# EAGLE board axiom_beta_power_board_v1.25-Beta.0e59fee9 (EAGLE 7.7.0), part 1 of 5
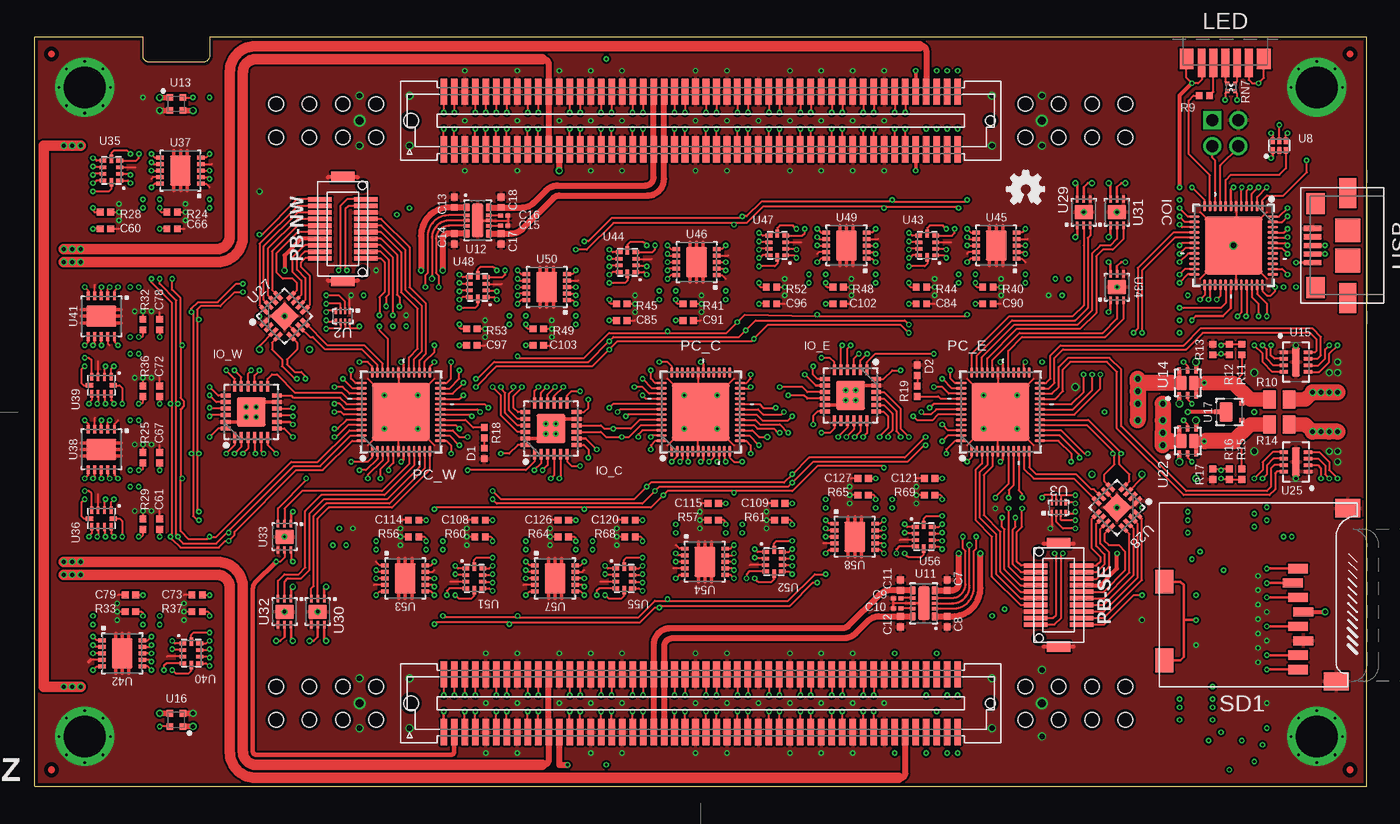
[diagram p0: board, top side]
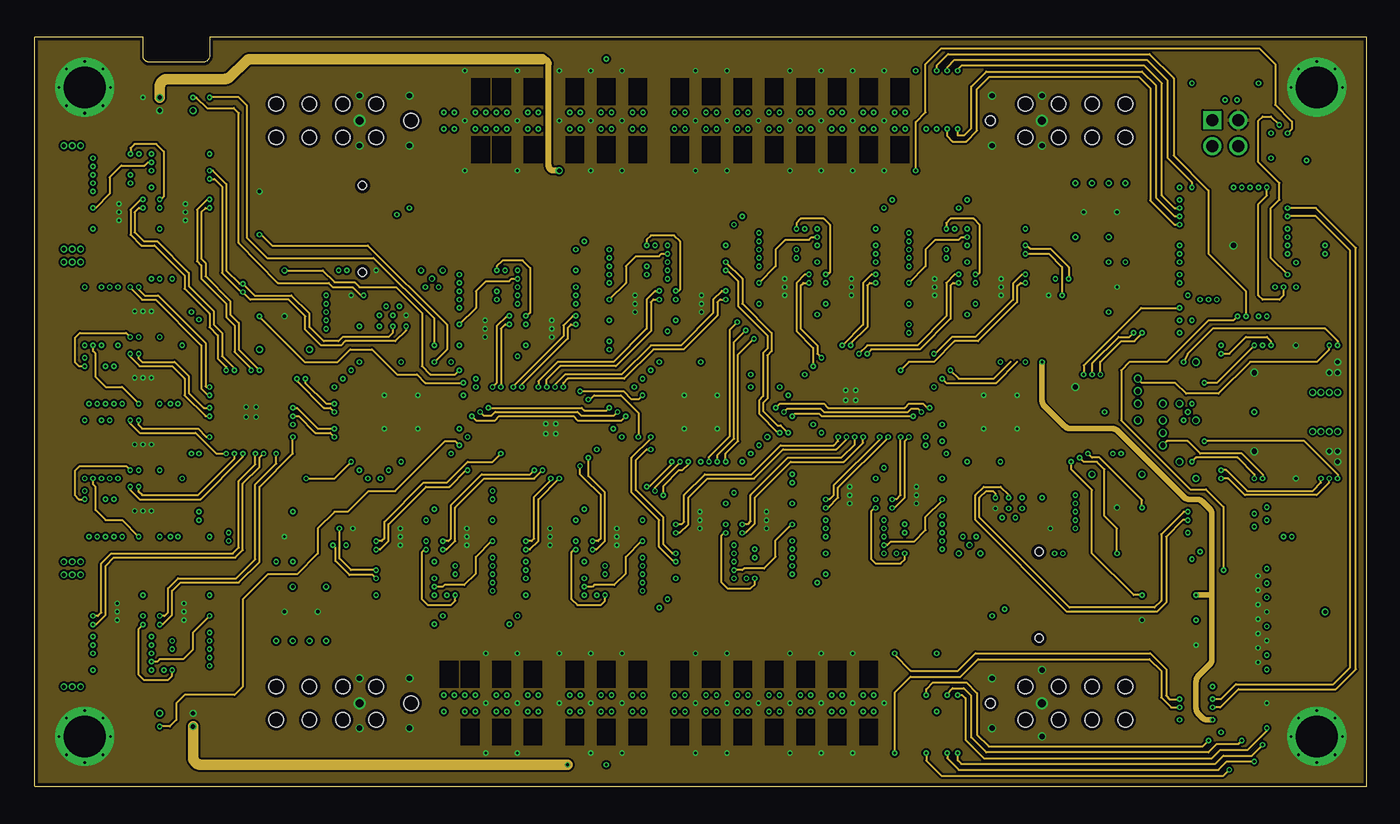
[diagram p1: board, inner layer Route2]
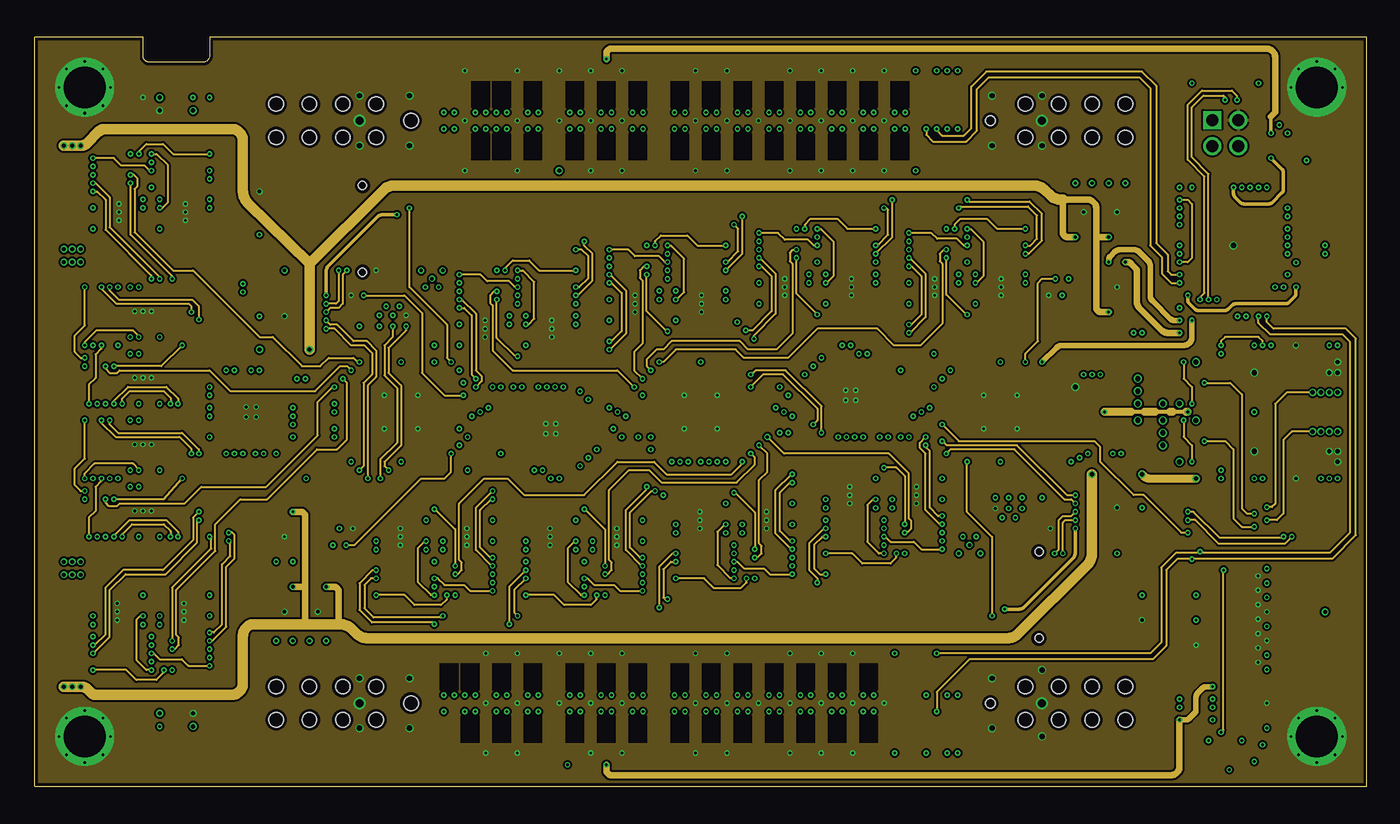
[diagram p2: board, inner layer Route15]
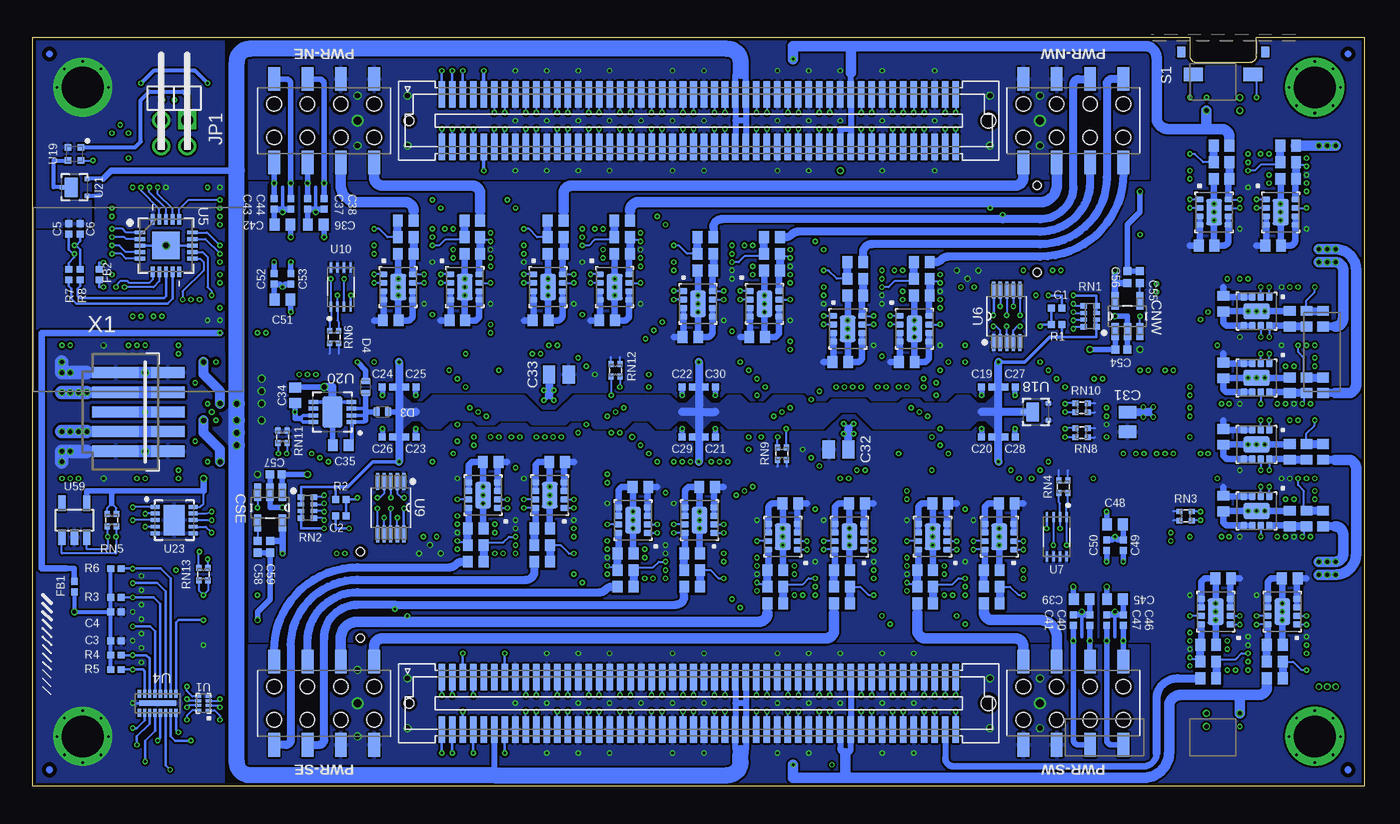
[diagram p3: board, bottom side, seen from below]

Size 101.6 x 57.15 mm. Coordinates in mm from the lower left corner, seen from the top.
Outline: 101.6,57.15 13.33,57.15 13.33,55.75 arc-90 12.83,55.25 8.76,55.25 arc-90 8.25,55.75 8.25,57.15 0,57.15 0,0 101.6,0 101.6,57.15
Copper layers (1*2*15*16): Top 0.035559375mm / dielectric 0.17018125mm / Route2 0.01778125mm / dielectric 47mil / Route15 0.01778125mm / dielectric 0.17018125mm / Bottom 0.035559375mm
Design rules "OSHPark-4layer-tuned *": minimum track width 5mil, minimum drill 8mil, track to track 6mil, track to pad 5mil, pad to pad 5mil, via to via 5mil, smd to smd 0mil, copper to edge 10mil, drill to drill 6mil, minimum pad ring 4mil, minimum via ring 4mil, stop-mask expansion 2mil, vias tented up to drill 25mil, thermal gap 6mil
Net classes: 1 LVDS: width 0.152 mm, drill 0.203 mm, clearance 0.152 mm
tKeepout: area 1.3,50.8 to 6.3,55.9; area 1.3,1.3 to 6.3,6.3; area 95.2,1.3 to 100.3,6.3; area 95.2,50.8 to 100.3,55.9
bKeepout: area 95.2,50.8 to 100.3,55.9; area 95.2,1.3 to 100.3,6.3; area 1.3,1.3 to 6.3,6.3; area 1.3,50.8 to 6.3,55.9

## Footprints (pad centres in the part's own frame; a part is rotated, then mirrored left to right if it is on the bottom)
µZ-SOCKET-NOHOLES-R = smd 0.5 x 2: 1 19.6,24.425; 2 19.6,20.027; 3 18.8,24.425; 4 18.8,20.027; 5 18,24.425; 6 18,20.027; 7 17.2,24.425; 8 17.2,20.027; 9 16.4,24.425; 10 16.4,20.027; 11 15.6,24.425; 12 15.6,20.027; 13 14.8,24.425; 14 14.8,20.027; 15 14,24.425; 16 14,20.027; 17 13.2,24.425; 18 13.2,20.027; 19 12.4,24.425; 20 12.4,20.027; 21 11.6,24.425; 22 11.6,20.027; 23 10.8,24.425; 24 10.8,20.027; 25 10,24.425; 26 10,20.027; 27 9.2,24.425; 28 9.2,20.027; 29 8.4,24.425; 30 8.4,20.027; 31 7.6,24.425; 32 7.6,20.027; 33 6.8,24.425; 34 6.8,20.027; 35 6,24.425; 36 6,20.027; 37 5.2,24.425; 38 5.2,20.027; 39 4.4,24.425; 40 4.4,20.027; 41 3.6,24.425; 42 3.6,20.027; 43 2.8,24.425; 44 2.8,20.027; 45 2,24.425; 46 2,20.027; 47 1.2,24.425; 48 1.2,20.027; 49 0.4,24.425; 50 0.4,20.027; 51 -0.4,24.425; 52 -0.4,20.027; 53 -1.2,24.425; 54 -1.2,20.027; 55 -2,24.425; 56 -2,20.027; 57 -2.8,24.425; 58 -2.8,20.027; 59 -3.6,24.425; 60 -3.6,20.027; 61 -4.4,24.425; 62 -4.4,20.027; 63 -5.2,24.425; 64 -5.2,20.027; 65 -6,24.425; 66 -6,20.027; 67 -6.8,24.425; 68 -6.8,20.027; 69 -7.6,24.425; 70 -7.6,20.027; 71 -8.4,24.425; 72 -8.4,20.027; 73 -9.2,24.425; 74 -9.2,20.027; 75 -10,24.425; 76 -10,20.027; 77 -10.8,24.425; 78 -10.8,20.027; 79 -11.6,24.425; 80 -11.6,20.027; 81 -12.4,24.425; 82 -12.4,20.027; 83 -13.2,24.425; 84 -13.2,20.027; 85 -14,24.425; 86 -14,20.027; 87 -14.8,24.425; 88 -14.8,20.027; 89 -15.6,24.425; 90 -15.6,20.027; 91 -16.4,24.425; 92 -16.4,20.027; 93 -17.2,24.425; 94 -17.2,20.027; 95 -18,24.425; 96 -18,20.027; 97 -18.8,24.425; 98 -18.8,20.027; 99 -19.6,24.425; 100 -19.6,20.027; 101 19.6,-20.025; 102 19.6,-24.425; 103 18.8,-20.027; 104 18.8,-24.425; 105 18,-20.027; 106 18,-24.425; 107 17.2,-20.027; 108 17.2,-24.425; 109 16.4,-20.027; 110 16.4,-24.425; 111 15.6,-20.027; 112 15.6,-24.425; 113 14.8,-20.027; 114 14.8,-24.425; 115 14,-20.027; 116 14,-24.425; 117 13.2,-20.027; 118 13.2,-24.425; 119 12.4,-20.027; 120 12.4,-24.425; 121 11.6,-20.027; 122 11.6,-24.425; 123 10.8,-20.027; 124 10.8,-24.425; 125 10,-20.027; 126 10,-24.425; 127 9.2,-20.027; 128 9.2,-24.425; 129 8.4,-20.027; 130 8.4,-24.425; 131 7.6,-20.027; 132 7.6,-24.425; 133 6.8,-20.027; 134 6.8,-24.425; 135 6,-20.027; 136 6,-24.425; 137 5.2,-20.027; 138 5.2,-24.425; 139 4.4,-20.027; 140 4.4,-24.425; 141 3.6,-20.027; 142 3.6,-24.425; 143 2.8,-20.027; 144 2.8,-24.425; 145 2,-20.027; 146 2,-24.425; 147 1.2,-20.027; 148 1.2,-24.425; 149 0.4,-20.027; 150 0.4,-24.425; 151 -0.4,-20.027; 152 -0.4,-24.425; 153 -1.2,-20.027; 154 -1.2,-24.425; 155 -2,-20.027; 156 -2,-24.425; 157 -2.8,-20.027; 158 -2.8,-24.425; 159 -3.6,-20.027; 160 -3.6,-24.425; 161 -4.4,-20.027; 162 -4.4,-24.425; 163 -5.2,-20.027; 164 -5.2,-24.425; 165 -6,-20.027; 166 -6,-24.425; 167 -6.8,-20.027; 168 -6.8,-24.425; 169 -7.6,-20.027; 170 -7.6,-24.425; 171 -8.4,-20.027; 172 -8.4,-24.425; 173 -9.2,-20.027; 174 -9.2,-24.425; 175 -10,-20.027; 176 -10,-24.425; 177 -10.8,-20.027; 178 -10.8,-24.425; 179 -11.6,-20.027; 180 -11.6,-24.425; 181 -12.4,-20.027; 182 -12.4,-24.425; 183 -13.2,-20.027; 184 -13.2,-24.425; 185 -14,-20.027; 186 -14,-24.425; 187 -14.8,-20.027; 188 -14.8,-24.425; 189 -15.6,-20.027; 190 -15.6,-24.425; 191 -16.4,-20.027; 192 -16.4,-24.425; 193 -17.2,-20.027; 194 -17.2,-24.425; 195 -18,-20.027; 196 -18,-24.425; 197 -18.8,-20.027; 198 -18.8,-24.425; 199 -19.6,-20.027; 200 -19.6,-24.425 | hole 0.725: 22.1,22.225; 22.1,-22.225 | hole 1.125: -22.1,22.225; -22.1,-22.225
0402-C = smd 0.52 x 0.52: 1 -0.4,0; 2 0.4,0
0201-C = smd 0.36 x 0.32: 1 -0.28,0; 2 0.28,0
0805-C = smd 0.95 x 1.35: 1 -0.75,0; 2 0.75,0
0603-C = smd 0.75 x 0.9: 1 -0.6,0; 2 0.6,0
0402-B = smd 0.62 x 0.62: 1 -0.45,0; 2 0.45,0
SOT95P280X145-5N = smd 1.321 x 0.559: 1 -1.168,0.94; 2 -1.168,0; 3 -1.168,-0.94; 4 1.168,-0.94; 5 1.168,0.94
DFN1006D-2 = smd 0.5 x 0.7: A 0.45,0; C -0.45,0
QFN50P400X400X80-25N-NSM = smd 0.813 x 0.305: 1 -1.95,1.25; 2 -1.95,0.75; 3 -1.95,0.25; 4 -1.95,-0.25; 5 -1.95,-0.75; 6 -1.95,-1.25; 13 1.95,-1.25; 14 1.95,-0.75; 15 1.95,-0.25; 16 1.95,0.25; 17 1.95,0.75; 18 1.95,1.25 | smd 0.305 x 0.813: 7 -1.25,-1.95; 8 -0.75,-1.95; 9 -0.25,-1.95; 10 0.25,-1.95; 11 0.75,-1.95; 12 1.25,-1.95; 19 1.25,1.95; 20 0.75,1.95; 21 0.25,1.95; 22 -0.25,1.95; 23 -0.75,1.95; 24 -1.25,1.95 | smd 2.2 x 2.2: 25 0,0
UQFN40P600X600X100-49N-NSM = smd 0.8 x 0.2: 1 -3,2.2; 2 -3,1.8; 3 -3,1.4; 4 -3,1; 5 -3,0.6; 6 -3,0.2; 7 -3,-0.2; 8 -3,-0.6; 9 -3,-1; 10 -3,-1.4; 11 -3,-1.8; 12 -3,-2.2; 25 3,-2.2; 26 3,-1.8; 27 3,-1.4; 28 3,-1; 29 3,-0.6; 30 3,-0.2; 31 3,0.2; 32 3,0.6; 33 3,1; 34 3,1.4; 35 3,1.8; 36 3,2.2 | smd 0.2 x 0.8: 13 -2.2,-3; 14 -1.8,-3; 15 -1.4,-3; 16 -1,-3; 17 -0.6,-3; 18 -0.2,-3; 19 0.2,-3; 20 0.6,-3; 21 1,-3; 22 1.4,-3; 23 1.8,-3; 24 2.2,-3; 37 2.2,3; 38 1.8,3; 39 1.4,3; 40 1,3; 41 0.6,3; 42 0.2,3; 43 -0.2,3; 44 -0.6,3; 45 -1,3; 46 -1.4,3; 47 -1.8,3; 48 -2.2,3 | smd 4.4 x 4.4: EP 0,0
2X02M/90-S = drill 0.914 square: 1 1,1 | drill 0.914: 2 1,-1; 3 -1,1; 4 -1,-1
MSL0104 = smd 1.06 x 1.58: 1 -2.95,-1; 7 2.95,-1 | smd 0.6 x 2.18: 2 -1.8,-1.3; 3 -0.9,-1.3; 4 0,-1.3; 5 0.9,-1.3; 6 1.8,-1.3
DF12(XX)-20DP-0.5V = smd 1.8 x 0.35: 1 -1.75,2.25; 2 1.75,2.25; 3 -1.75,1.75; 4 1.75,1.75; 5 -1.75,1.25; 6 1.75,1.25; 7 -1.75,0.75; 8 1.75,0.75; 9 -1.75,0.25; 10 1.75,0.25; 11 -1.75,-0.25; 12 1.75,-0.25; 13 -1.75,-0.75; 14 1.75,-0.75; 15 -1.75,-1.25; 16 1.75,-1.25; 17 -1.75,-1.75; 18 1.75,-1.75; 19 -1.75,-2.25; 20 1.75,-2.25 | smd 1.8 x 0.8: M1 0,3.95; M2 0,-3.95 | hole 0.625: 1.5,-3.3; 1.5,3.3
R2X04 = smd 0.9 x 1.8: 1 -3.81,3.175; 2 -3.81,-3.175; 3 -1.27,3.175; 4 -1.27,-3.175; 5 1.27,3.175; 6 1.27,-3.175; 7 3.81,3.175; 8 3.81,-3.175 | hole 1.1: -3.81,1.27; -1.27,1.27; -1.27,-1.27; -3.81,-1.27; 1.27,1.27; 1.27,-1.27; 3.81,1.27; 3.81,-1.27
4X0402ARV341 = smd 0.4 x 0.5: 1 -0.8,-0.5; 4 0.8,-0.5; 5 0.8,0.5; 8 -0.8,0.5 | smd 0.3 x 0.5: 2 -0.25,-0.5; 3 0.25,-0.5; 6 0.25,0.5; 7 -0.25,0.5
EXB24V = smd 0.4 x 0.45: 1 -0.35,-0.475; 2 0.35,-0.475; 3 0.35,0.475; 4 -0.35,0.475
EXB14V = smd 0.3 x 0.3: 1 -0.3,-0.3; 2 0.3,-0.3; 3 0.3,0.3; 4 -0.3,0.3
SKSNLAE010 = smd 1.45 x 1.05: 1 -2.275,2.575; 2 2.275,2.575 | smd 0.6 x 0.8: 3 -3.2,0.85; 4 3.2,0.85
TF-MICRO-SD_PP2 = smd 0.7 x 1.5: 1 9,-10.64; 2 7.9,-10.24; 3 6.8,-10.64; 4 5.7,-11.04; 5 4.6,-10.64; 6 3.5,-11.04; 7 2.4,-10.64; 8 1.3,-10.64 | smd 1.8 x 1.4: CD1 2,-0.44; CD2 8,-0.44 | smd 1.4 x 1.9: MT1 0.4,-13.54; MT2 13.6,-14.44
X2SON-8 = smd 0.2 x 0.52: 1 -0.525,-0.4; 2 -0.175,-0.4; 3 0.175,-0.4; 4 0.525,-0.4; 5 0.525,0.4; 6 0.175,0.4; 7 -0.175,0.4; 8 -0.525,0.4
UDFN-8 = smd 0.22 x 0.48: 1 -0.525,-0.43; 2 -0.175,-0.43; 3 0.175,-0.43; 4 0.525,-0.43; 5 0.525,0.43; 6 0.175,0.43; 7 -0.175,0.43; 8 -0.525,0.43
SON40P135X330X55-17N = smd 0.61 x 0.254: 1 -0.737,1.397; 2 -0.737,0.991; 3 -0.737,0.61; 4 -0.737,0.203; 5 -0.737,-0.203; 6 -0.737,-0.61; 7 -0.737,-0.991; 8 -0.737,-1.397; 9 0.737,-1.397; 10 0.737,-0.991; 11 0.737,-0.61; 12 0.737,-0.203; 13 0.737,0.203; 14 0.737,0.61; 15 0.737,0.991; 16 0.737,1.397 | smd 0.406 x 2.794: 17 0,0
QFN65P400X400X100-21N = smd 0.8 x 0.3: 1 -2,1; 2 -2,0.5; 3 -2,0; 4 -2,-0.5; 5 -2,-1; 11 2,-1; 12 2,-0.5; 13 2,0; 14 2,0.5; 15 2,1 | smd 0.3 x 0.8: 6 -1,-2; 7 -0.5,-2; 8 0,-2; 9 0.5,-2; 10 1,-2; 16 1,2; 17 0.5,2; 18 0,2; 19 -0.5,2; 20 -1,2 | smd 2.1 x 2.1: EP 0,0
SOP50P490X110-10N = smd 1.3 x 0.32: 1 -2,1; 2 -2,0.5; 3 -2,0; 4 -2,-0.5; 5 -2,-1; 6 2,-1; 7 2,-0.5; 8 2,0; 9 2,0.5; 10 2,1
SOT996-2/3 = smd 0.25 x 0.75: 1 -0.75,-1.5; 2 -0.25,-1.5; 3 0.25,-1.5; 4 0.75,-1.5; 5 0.75,1.5; 6 0.25,1.5; 7 -0.25,1.5; 8 -0.75,1.5
MICROPAK-6 = smd 0.3 x 0.5: 1 -0.5,-0.375; 2 0,-0.375; 3 0.5,-0.375; 4 0.5,0.375; 5 0,0.375; 6 -0.5,0.375
V-DFN3020-14 = smd 0.65 x 0.5: 1 -1,-0.85; 5 1,-0.85; 6 1,0.85; 10 -1,0.85 | smd 0.25 x 0.5: 2 -0.4,-0.85; 3 0,-0.85; 4 0.4,-0.85; 7 0.4,0.85; 8 0,0.85; 9 -0.4,0.85 | smd 2.55 x 0.9: EP 0,0
MLF-4 = smd 0.5 x 0.5: 1 -0.5,-0.5; 2 0.5,-0.5; 3 0.5,0.5; 4 -0.5,0.5
UDFN6 = smd 0.47 x 0.35: 1 -0.95,0.65; 2 -0.95,0; 3 -0.95,-0.65; 4 0.95,-0.65; 5 0.95,0; 6 0.95,0.65 | smd 1.1 x 0.75: D1 0,0.46; D2 0,-0.46
DFN8 = smd 0.25 x 0.7: 1 -0.75,-0.925; 2 -0.25,-0.925; 3 0.25,-0.925; 4 0.75,-0.925; 5 0.75,0.925; 6 0.25,0.925; 7 -0.25,0.925; 8 -0.75,0.925 | smd 2.2 x 0.6: EP 0,0
DFN2020D-3 = smd 0.45 x 0.35: 1 -0.95,0.65; 2 -0.95,-0.65; 3 0.95,0 | smd 1 x 1.5: 4 0.25,0
DFN3X3_8LEAD = smd 0.813 x 0.305: 1 -1.448,0.762; 2 -1.448,0.254; 3 -1.448,-0.254; 4 -1.448,-0.762; 5 1.448,-0.762; 6 1.448,-0.254; 7 1.448,0.254; 8 1.448,0.762 | smd 1.549 x 2.388: 9 0,0
DFN3X3_10LEAD = smd 0.7 x 0.3: 1 -1.45,1; 2 -1.45,0.5; 3 -1.45,0; 4 -1.45,-0.5; 5 -1.45,-1; 6 1.45,-1; 7 1.45,-0.5; 8 1.45,0; 9 1.45,0.5; 10 1.45,1 | smd 1.6 x 2.3: EPAD 0,0
QFN50P300X300X80-17N = smd 0.8 x 0.3: 1 -1.45,0.75; 2 -1.45,0.25; 3 -1.45,-0.25; 4 -1.45,-0.75; 9 1.45,-0.75; 10 1.45,-0.25; 11 1.45,0.25; 12 1.45,0.75 | smd 0.3 x 0.8: 5 -0.75,-1.45; 6 -0.25,-1.45; 7 0.25,-1.45; 8 0.75,-1.45; 13 0.75,1.45; 14 0.25,1.45; 15 -0.25,1.45; 16 -0.75,1.45 | smd 1.55 x 1.55: EP 0,0
DFN2018-6 = smd 0.25 x 0.55: 1 -0.5,-1; 2 0,-1; 3 0.5,-1; 4 0.5,1; 5 0,1; 6 -0.5,1 | smd 1.4 x 1.1: 10 0,0
X2QFN-10 = smd 0.3 x 0.58: 1 -0.75,-0.64; 4 0.75,-0.64; 6 0.75,0.64; 9 -0.75,0.64 | smd 0.25 x 0.58: 2 -0.25,-0.64; 3 0.25,-0.64; 7 0.25,0.64; 8 -0.25,0.64 | smd 0.64 x 0.35: 5 0.9,0; 10 -0.9,0
DFN-10 = smd 0.3 x 0.65: 1 -1,-1.55; 2 -0.5,-1.55; 3 0,-1.55; 4 0.5,-1.55; 5 1,-1.55; 6 1,1.55; 7 0.5,1.55; 8 0,1.55; 9 -0.5,1.55; 10 -1,1.55 | smd 2.3 x 1.6: EP 0,0
SOT23-5L = smd 0.55 x 1.2: 1 -0.95,-1.3; 2 0,-1.3; 3 0.95,-1.3; 4 0.95,1.3; 5 -0.95,1.3
MICROSIP = smd 0.48 x 0.58: 1 -0.975,-1.1; 2 -0.325,-1.1; 3 0.325,-1.1; 4 0.975,-1.1; 5 0.975,1.1; 6 0.325,1.1; 7 -0.325,1.1; 8 -0.975,1.1 | smd 2 x 1.2: EP 0,0
MICROSIP-DD = smd 0.48 x 0.58: 1 -0.975,-1.1; 2 -0.325,-1.1; 3 0.325,-1.1; 4 0.975,-1.1; 5 0.975,1.1; 6 0.325,1.1; 7 -0.325,1.1; 8 -0.975,1.1 | smd 2 x 1.2: EP 0,0
MICRO-AB-H-SMT = smd 0.4 x 1.35: 1 -1.3,4.125; 2 -0.65,4.125; 3 0,4.125; 4 0.65,4.125; 5 1.3,4.125 | smd 2.3 x 1.3: Z1 -4,1.45; Z4 4,1.45 | smd 1.8 x 1.9: Z2 -1.15,1.45; Z3 1.15,1.45 | smd 1.6 x 1.4: Z5 -3.2,3.9; Z6 3.2,3.9
PICO-SPOX-5 = smd 0.85 x 2.55: 1 -3,-6.5; 2 -1.5,-6.5; 3 0,-6.5; 4 1.5,-6.5; 5 3,-6.5 | smd 0.85 x 3.55: 1A -3,-2.5; 2A -1.5,-2.5; 3A 0,-2.5; 4A 1.5,-2.5; 5A 3,-2.5
µZ-CONONLY = smd 0.5 x 2: 1 19.6,-24.226; 2 19.6,-20.226; 3 18.8,-24.226; 4 18.8,-20.226; 5 18,-24.226; 6 18,-20.226; 7 17.2,-24.226; 8 17.2,-20.226; 9 16.4,-24.226; 10 16.4,-20.226; 11 15.6,-24.226; 12 15.6,-20.226; 13 14.8,-24.226; 14 14.8,-20.226; 15 14,-24.226; 16 14,-20.226; 17 13.2,-24.226; 18 13.2,-20.226; 19 12.4,-24.226; 20 12.4,-20.226; 21 11.6,-24.226; 22 11.6,-20.226; 23 10.8,-24.226; 24 10.8,-20.226; 25 10,-24.226; 26 10,-20.226; 27 9.2,-24.226; 28 9.2,-20.226; 29 8.4,-24.226; 30 8.4,-20.226; 31 7.6,-24.226; 32 7.6,-20.226; 33 6.8,-24.226; 34 6.8,-20.226; 35 6,-24.226; 36 6,-20.226; 37 5.2,-24.226; 38 5.2,-20.226; 39 4.4,-24.226; 40 4.4,-20.226; 41 3.6,-24.226; 42 3.6,-20.226; 43 2.8,-24.226; 44 2.8,-20.226; 45 2,-24.226; 46 2,-20.226; 47 1.2,-24.226; 48 1.2,-20.226; 49 0.4,-24.226; 50 0.4,-20.226; 51 -0.4,-24.226; 52 -0.4,-20.226; 53 -1.2,-24.226; 54 -1.2,-20.226; 55 -2,-24.226; 56 -2,-20.226; 57 -2.8,-24.226; 58 -2.8,-20.226; 59 -3.6,-24.226; 60 -3.6,-20.226; 61 -4.4,-24.226; 62 -4.4,-20.226; 63 -5.2,-24.226; 64 -5.2,-20.226; 65 -6,-24.226; 66 -6,-20.226; 67 -6.8,-24.226; 68 -6.8,-20.226; 69 -7.6,-24.226; 70 -7.6,-20.226; 71 -8.4,-24.226; 72 -8.4,-20.226; 73 -9.2,-24.226; 74 -9.2,-20.226; 75 -10,-24.226; 76 -10,-20.226; 77 -10.8,-24.226; 78 -10.8,-20.226; 79 -11.6,-24.226; 80 -11.6,-20.226; 81 -12.4,-24.226; 82 -12.4,-20.226; 83 -13.2,-24.226; 84 -13.2,-20.226; 85 -14,-24.226; 86 -14,-20.226; 87 -14.8,-24.226; 88 -14.8,-20.226; 89 -15.6,-24.226; 90 -15.6,-20.226; 91 -16.4,-24.226; 92 -16.4,-20.226; 93 -17.2,-24.226; 94 -17.2,-20.226; 95 -18,-24.226; 96 -18,-20.226; 97 -18.8,-24.226; 98 -18.8,-20.226; 99 -19.6,-24.226; 100 -19.6,-20.226; 101 19.6,20.226; 102 19.6,24.226; 103 18.8,20.226; 104 18.8,24.226; 105 18,20.226; 106 18,24.226; 107 17.2,20.226; 108 17.2,24.226; 109 16.4,20.226; 110 16.4,24.226; 111 15.6,20.226; 112 15.6,24.226; 113 14.8,20.226; 114 14.8,24.226; 115 14,20.226; 116 14,24.226; 117 13.2,20.226; 118 13.2,24.226; 119 12.4,20.226; 120 12.4,24.226; 121 11.6,20.226; 122 11.6,24.226; 123 10.8,20.226; 124 10.8,24.226; 125 10,20.226; 126 10,24.226; 127 9.2,20.226; 128 9.2,24.226; 129 8.4,20.226; 130 8.4,24.226; 131 7.6,20.226; 132 7.6,24.226; 133 6.8,20.226; 134 6.8,24.226; 135 6,20.226; 136 6,24.226; 137 5.2,20.226; 138 5.2,24.226; 139 4.4,20.226; 140 4.4,24.226; 141 3.6,20.226; 142 3.6,24.226; 143 2.8,20.226; 144 2.8,24.226; 145 2,20.226; 146 2,24.226; 147 1.2,20.226; 148 1.2,24.226; 149 0.4,20.226; 150 0.4,24.226; 151 -0.4,20.226; 152 -0.4,24.226; 153 -1.2,20.226; 154 -1.2,24.226; 155 -2,20.226; 156 -2,24.226; 157 -2.8,20.226; 158 -2.8,24.226; 159 -3.6,20.226; 160 -3.6,24.226; 161 -4.4,20.226; 162 -4.4,24.226; 163 -5.2,20.226; 164 -5.2,24.226; 165 -6,20.226; 166 -6,24.226; 167 -6.8,20.226; 168 -6.8,24.226; 169 -7.6,20.226; 170 -7.6,24.226; 171 -8.4,20.226; 172 -8.4,24.226; 173 -9.2,20.226; 174 -9.2,24.226; 175 -10,20.226; 176 -10,24.226; 177 -10.8,20.226; 178 -10.8,24.226; 179 -11.6,20.226; 180 -11.6,24.226; 181 -12.4,20.226; 182 -12.4,24.226; 183 -13.2,20.226; 184 -13.2,24.226; 185 -14,20.226; 186 -14,24.226; 187 -14.8,20.226; 188 -14.8,24.226; 189 -15.6,20.226; 190 -15.6,24.226; 191 -16.4,20.226; 192 -16.4,24.226; 193 -17.2,20.226; 194 -17.2,24.226; 195 -18,20.226; 196 -18,24.226; 197 -18.8,20.226; 198 -18.8,24.226; 199 -19.6,20.226; 200 -19.6,24.226 | hole 1.125: -22.1,-22.225; -22.1,22.225 | hole 0.725: 22.1,-22.225; 22.1,22.225

## Placement (x,y rotation side)
BETA  µZ-FCI-SOCKET-NOHOLES-R  [µZ-SOCKET-NOHOLES-R]  50.8,28.57 0 top
C1  10n  [0402-C]  23.49,36.51 0 bottom
C2  10n  [0402-C]  78.1,20.64 180 bottom
C3  1u  [0402-C]  95.25,11.12 0 bottom
C4  100n  [0402-C]  95.25,13.32 0 bottom
C5  [0402-C]  98.87,42.55 90 bottom
C6  [0402-C]  97.98,42.55 90 bottom
C7  [0402-C]  69.6,15.37 90 top
C8  [0402-C]  69.6,12.57 270 top
C9  [0201-C]  65.79,14.35 180 top
C10  [0201-C]  65.79,13.59 180 top
C11  [0402-C]  66.04,15.37 90 top
C12  [0402-C]  66.04,12.57 270 top
C13  [0402-C]  32,44.58 90 top
C14  [0402-C]  32,41.78 270 top
C15  [0201-C]  35.81,42.8 0 top
C16  [0201-C]  35.81,43.56 0 top
C17  [0402-C]  35.56,41.78 270 top
C18  [0402-C]  35.56,44.58 90 top
C19  100n  [0402-C]  28.83,30.48 180 bottom
C20  100n  [0402-C]  28.83,26.67 180 bottom
C21  100n  [0402-C]  49.91,26.67 0 bottom
C22  100n  [0402-C]  51.69,30.48 180 bottom
C23  100n  [0402-C]  72.77,26.67 0 bottom
C24  100n  [0402-C]  74.55,30.48 180 bottom
C25  4u7  [0402-C]  72.77,30.48 0 bottom
C26  4u7  [0402-C]  74.55,26.67 180 bottom
C27  4u7  [0402-C]  27.05,30.48 0 bottom
C28  4u7  [0402-C]  27.05,26.67 0 bottom
C29  4u7  [0402-C]  51.69,26.67 180 bottom
C30  4u7  [0402-C]  49.91,30.48 0 bottom
C31  47u  [0805-C]  18.1,27.81 90 bottom
C32  47u  [0805-C]  40.13,25.72 0 bottom
C33  47u  [0805-C]  61.47,31.43 180 bottom
C34  10u  [0603-C]  81.6,29.84 90 bottom
C35  10u  [0603-C]  78.1,26.04 180 bottom
C36  4u7  [0603-C]  80.01,42.86 180 bottom
C37  1u  [0402-C]  80.64,44.45 270 bottom
C38  1u  [0402-C]  79.38,44.45 270 bottom
C39  4u7  [0603-C]  21.59,14.29 0 bottom
C40  1u  [0402-C]  20.95,12.7 90 bottom
C41  1u  [0402-C]  22.22,12.7 90 bottom
C42  4u7  [0603-C]  82.55,42.86 180 bottom
C43  1u  [0402-C]  83.19,44.45 270 bottom
C44  1u  [0402-C]  81.91,44.45 270 bottom
C45  4u7  [0603-C]  19.05,14.29 0 bottom
C46  1u  [0402-C]  18.41,12.7 90 bottom
C47  1u  [0402-C]  19.68,12.7 90 bottom
C48  4u7  [0603-C]  19.05,20 0 bottom
C49  1u  [0402-C]  18.41,18.41 90 bottom
C50  1u  [0402-C]  19.68,18.41 90 bottom
C51  4u7  [0603-C]  82.55,37.15 180 bottom
C52  1u  [0402-C]  83.19,38.73 270 bottom
C53  1u  [0402-C]  81.91,38.73 270 bottom
C54  1u  [0402-B]  18.57,33.34 0 bottom
C55  10n  [0402-B]  17.14,38.86 90 bottom
C56  1u  [0402-B]  18.1,38.86 90 bottom
C57  1u  [0402-B]  83.06,23.81 180 bottom
C58  10n  [0402-B]  84.45,18.29 270 bottom
C59  1u  [0402-B]  83.5,18.29 270 bottom
C60  [0402-C]  5.4,42.55 0 top
C61  [0402-C]  9.52,20 90 top
C62  [0603-C]  12.06,41.27 0 bottom
C63  [0603-C]  10.92,46.36 180 bottom
C64  [0603-C]  10.79,26.67 270 bottom
C65  [0603-C]  5.71,25.53 90 bottom
C66  [0402-C]  10.48,42.55 0 top
C67  [0402-C]  9.52,25.08 90 top
C68  [0603-C]  6.98,41.27 0 bottom
C69  [0603-C]  5.84,46.36 180 bottom
C70  [0603-C]  10.79,21.59 270 bottom
C71  [0603-C]  5.71,20.45 90 bottom
C72  [0402-C]  9.52,30.16 90 top
C73  [0402-C]  12.38,14.6 180 top
C74  [0603-C]  10.79,36.83 270 bottom
C75  [0603-C]  5.71,35.69 90 bottom
C76  [0603-C]  5.71,15.88 180 bottom
C77  [0603-C]  6.86,10.79 0 bottom
C78  [0402-C]  9.52,35.24 90 top
C79  [0402-C]  7.3,14.6 180 top
C80  [0603-C]  10.79,31.75 270 bottom
C81  [0603-C]  5.71,30.61 90 bottom
C82  [0603-C]  10.79,15.88 180 bottom
C83  [0603-C]  11.94,10.79 0 bottom
C84  [0402-C]  67.63,36.83 0 top
C85  [0402-C]  44.77,35.56 0 top
C86  [0603-C]  74.3,35.56 0 bottom
C87  [0603-C]  73.15,40.64 180 bottom
C88  [0603-C]  51.43,34.29 0 bottom
C89  [0603-C]  50.29,39.37 180 bottom
C90  [0402-C]  72.71,36.83 0 top
C91  [0402-C]  49.85,35.56 0 top
C92  [0603-C]  69.22,35.56 0 bottom
C93  [0603-C]  68.07,40.64 180 bottom
C94  [0603-C]  46.35,34.29 0 bottom
C95  [0603-C]  45.21,39.37 180 bottom
C96  [0402-C]  56.2,36.83 0 top
C97  [0402-C]  33.34,33.66 0 top
C98  [0603-C]  62.86,35.56 0 bottom
C99  [0603-C]  61.72,40.64 180 bottom
C100  [0603-C]  40,32.38 0 bottom
C101  [0603-C]  38.86,37.47 180 bottom
C102  [0402-C]  61.28,36.83 0 top
C103  [0402-C]  38.42,33.66 0 top
C104  [0603-C]  57.78,35.56 0 bottom
C105  [0603-C]  56.64,40.64 180 bottom
C106  [0603-C]  34.92,32.38 0 bottom
C107  [0603-C]  33.78,37.47 180 bottom
C108  [0402-C]  33.97,20.32 180 top
C109  [0402-C]  56.83,21.59 180 top
C110  [0603-C]  27.3,21.59 180 bottom
C111  [0603-C]  28.45,16.51 0 bottom
C112  [0603-C]  50.16,22.86 180 bottom
C113  [0603-C]  51.31,17.78 0 bottom
C114  [0402-C]  28.89,20.32 180 top
C115  [0402-C]  51.75,21.59 180 top
C116  [0603-C]  32.38,21.59 180 bottom
C117  [0603-C]  33.53,16.51 0 bottom
C118  [0603-C]  55.24,22.86 180 bottom
C119  [0603-C]  56.39,17.78 0 bottom
C120  [0402-C]  45.4,20.32 180 top
C121  [0402-C]  68.26,23.49 180 top
C122  [0603-C]  38.73,21.59 180 bottom
C123  [0603-C]  39.88,16.51 0 bottom
C124  [0603-C]  61.59,24.77 180 bottom
C125  [0603-C]  62.74,19.68 0 bottom
C126  [0402-C]  40.32,20.32 180 top
C127  [0402-C]  63.18,23.49 180 top
C128  [0603-C]  43.81,21.59 180 bottom
C129  [0603-C]  44.96,16.51 0 bottom
C130  [0603-C]  66.67,24.77 180 bottom
C131  [0603-C]  67.82,19.68 0 bottom
CNW  SPX3819M5-L  [SOT95P280X145-5N]  18.1,35.88 90 bottom
CSE  SPX3819M5-L  [SOT95P280X145-5N]  83.5,21.27 270 bottom
D1  [0402-C]  34.29,25.4 270 top
D2  [0402-C]  67.31,31.75 90 top
D3  PMEG2010BELD  [DFN1006D-2]  74.93,28.57 180 bottom
D4  PMEG2010BELD  [DFN1006D-2]  76.2,30.48 270 bottom
F1  FIDUCIAL  [FID_ARROW]  1.27,55.88 0 top
F2  FIDUCIAL  [FID_ARROW]  100.33,55.88 0 top
F3  FIDUCIAL  [FID_ARROW]  100.33,1.27 0 top
F4  FIDUCIAL  [FID_ARROW]  1.27,1.27 0 top
F5  FIDUCIAL  [FID_ARROW]  100.33,55.88 0 bottom
F6  FIDUCIAL  [FID_ARROW]  1.27,55.88 0 bottom
F7  FIDUCIAL  [FID_ARROW]  1.27,1.27 0 bottom
F8  FIDUCIAL  [FID_ARROW]  100.33,1.27 0 bottom
FB1  [0402-C]  98.42,15.24 270 bottom
FB2  [0402-C]  96.52,39.05 90 bottom
FB3  [0603-C]  10.92,48.89 0 bottom
FB4  [0603-C]  3.17,25.53 270 bottom
FB5  [0603-C]  5.84,48.89 0 bottom
FB6  [0603-C]  3.17,20.45 270 bottom
FB7  [0603-C]  3.17,35.69 270 bottom
FB8  [0603-C]  6.86,8.25 180 bottom
FB9  [0603-C]  3.17,30.61 270 bottom
FB10  [0603-C]  11.94,8.25 180 bottom
FB11  [0603-C]  73.15,43.18 0 bottom
FB12  [0603-C]  50.29,41.91 0 bottom
FB13  [0603-C]  68.07,43.18 0 bottom
FB14  [0603-C]  45.21,41.91 0 bottom
FB15  [0603-C]  61.72,43.18 0 bottom
FB16  [0603-C]  38.86,40 0 bottom
FB17  [0603-C]  56.64,43.18 0 bottom
FB18  [0603-C]  33.78,40 0 bottom
FB19  [0603-C]  28.45,13.97 180 bottom
FB20  [0603-C]  51.31,15.24 180 bottom
FB21  [0603-C]  33.53,13.97 180 bottom
FB22  [0603-C]  56.39,15.24 180 bottom
FB23  [0603-C]  39.88,13.97 180 bottom
FB24  [0603-C]  62.74,17.14 180 bottom
FB25  [0603-C]  44.96,13.97 180 bottom
FB26  [0603-C]  67.82,17.14 180 bottom
IO_C  MCP23018  [QFN50P400X400X80-25N-NSM]  39.37,27.3 90 top
IO_E  MCP23018  [QFN50P400X400X80-25N-NSM]  62.23,29.84 270 top
IO_W  MCP23018  [QFN50P400X400X80-25N-NSM]  16.51,28.57 90 top
IOC  PIC16F15386  [UQFN40P600X600X100-49N-NSM]  91.44,41.27 270 top
JP1  [2X02M/90-S]  90.81,49.85 0 bottom  (not fitted)
LED  MSL0104RGB  [MSL0104]  90.81,56.52 0 top
LOGO2  OSHW_LOGO_FILLX0100-NT  [OSHW_FILLX100_NOTEXT]  74.17,44.45 0 top
PB-NW  DF12(XX)-20DP-0.5V  [DF12(XX)-20DP-0.5V]  23.49,42.55 0 top
PB-SE  DF12(XX)-20DP-0.5V  [DF12(XX)-20DP-0.5V]  78.1,14.6 180 top
PC_C  PIC16F15386  [UQFN40P600X600X100-49N-NSM]  50.8,28.57 90 top
PC_E  PIC16F15386  [UQFN40P600X600X100-49N-NSM]  73.66,28.57 90 top
PC_W  PIC16F15386  [UQFN40P600X600X100-49N-NSM]  27.94,28.57 90 top
PWR-NE  PINRC-2X04  [R2X04]  79.38,50.8 180 bottom  (not fitted)
PWR-NW  PINRC-2X04  [R2X04]  22.22,50.8 0 bottom  (not fitted)
PWR-SE  PINRC-2X04  [R2X04]  79.38,6.35 180 bottom  (not fitted)
PWR-SW  PINRC-2X04  [R2X04]  22.22,6.35 0 bottom  (not fitted)
R1  200k  [0402-C]  23.49,35.24 180 bottom
R2  200k  [0402-C]  78.1,21.91 0 bottom
R3  50k  [0402-C]  95.25,14.42 0 bottom
R4  50k  [0402-C]  95.25,10.02 0 bottom
R5  50k  [0402-C]  95.25,8.92 0 bottom
R6  50k  [0402-C]  95.25,16.62 0 bottom
R7  [0402-C]  98.87,39.05 270 bottom
R8  [0402-C]  97.98,39.05 270 bottom
R9  [0402-C]  89.22,52.7 180 top
R10  [0805-C]  94.93,29.53 180 top
R11  [0402-C]  92.07,33.34 90 top
R12  [0402-C]  91.12,33.34 270 top
R13  [0402-C]  89.85,33.34 90 top
R14  [0805-C]  94.93,27.62 180 top
R15  [0402-C]  92.07,23.81 270 top
R16  [0402-C]  91.12,23.81 90 top
R17  [0402-C]  89.85,23.81 270 top
R18  [0402-C]  34.29,26.99 270 top
R19  [0402-C]  67.31,30.16 90 top
R22  [0603-C]  10.92,47.62 180 bottom
R23  [0603-C]  4.45,25.53 90 bottom
R24  [0402-C]  10.48,43.81 180 top
R25  [0402-C]  8.25,25.08 270 top
R26  [0603-C]  5.84,47.62 180 bottom
R27  [0603-C]  4.45,20.45 90 bottom
R28  [0402-C]  5.4,43.81 180 top
R29  [0402-C]  8.25,20 270 top
R30  [0603-C]  4.45,35.69 90 bottom
R31  [0603-C]  6.86,9.52 0 bottom
R32  [0402-C]  8.25,35.24 270 top
R33  [0402-C]  7.3,13.33 0 top
R34  [0603-C]  4.45,30.61 90 bottom
R35  [0603-C]  11.94,9.52 0 bottom
R36  [0402-C]  8.25,30.16 270 top
R37  [0402-C]  12.38,13.33 0 top
R38  [0603-C]  73.15,41.91 180 bottom
R39  [0603-C]  50.29,40.64 180 bottom
R40  [0402-C]  72.71,38.1 180 top
R41  [0402-C]  49.85,36.83 180 top
R42  [0603-C]  68.07,41.91 180 bottom
R43  [0603-C]  45.21,40.64 180 bottom
R44  [0402-C]  67.63,38.1 180 top
R45  [0402-C]  44.77,36.83 180 top
R46  [0603-C]  61.72,41.91 180 bottom
R47  [0603-C]  38.86,38.73 180 bottom
R48  [0402-C]  61.28,38.1 180 top
R49  [0402-C]  38.42,34.92 180 top
R50  [0603-C]  56.64,41.91 180 bottom
R51  [0603-C]  33.78,38.73 180 bottom
R52  [0402-C]  56.2,38.1 180 top
R53  [0402-C]  33.34,34.92 180 top
R54  [0603-C]  28.45,15.24 0 bottom
R55  [0603-C]  51.31,16.51 0 bottom
R56  [0402-C]  28.89,19.05 0 top
R57  [0402-C]  51.75,20.32 0 top
R58  [0603-C]  33.53,15.24 0 bottom
R59  [0603-C]  56.39,16.51 0 bottom
R60  [0402-C]  33.97,19.05 0 top
R61  [0402-C]  56.83,20.32 0 top
R62  [0603-C]  39.88,15.24 0 bottom
R63  [0603-C]  62.74,18.41 0 bottom
R64  [0402-C]  40.32,19.05 0 top
R65  [0402-C]  63.18,22.23 0 top
R66  [0603-C]  44.96,15.24 0 bottom
R67  [0603-C]  67.82,18.41 0 bottom
R68  [0402-C]  45.4,19.05 0 top
R69  [0402-C]  68.26,22.23 0 top
RN1  [4X0402ARV341]  20.95,35.88 270 bottom
RN2  [4X0402ARV341]  80.64,21.27 90 bottom
RN3  [EXB24V]  13.65,20.64 90 bottom
RN4  [EXB24V]  22.99,22.86 0 bottom
RN5  [EXB24V]  95.57,20.32 0 bottom
RN6  [EXB24V]  78.61,34.29 180 bottom
RN7  [EXB14V]  91.25,53.34 0 top
RN8  [EXB24V]  21.59,26.99 270 bottom
RN9  [EXB24V]  44.45,25.4 180 bottom
RN10  [EXB24V]  21.59,28.89 270 bottom
RN11  [EXB24V]  82.55,26.67 0 bottom
RN12  [EXB24V]  57.15,31.75 0 bottom
RN13  [EXB24V]  88.58,16.19 180 bottom
S1  SKSNLAE010  [SKSNLAE010]  10.79,56.9 180 bottom
SD1  MICRO-SD-2CD  [TF-MICRO-SD_PP2]  85.72,7.62 90 top
U1  TXS0102  [X2SON-8]  88.58,6.35 90 bottom
U2  PCA9306  [UDFN-8]  23.49,35.88 180 top
U3  PCA9306  [UDFN-8]  78.1,21.27 0 top
U4  IP4251CZ16-8-TTL  [SON40P135X330X55-17N]  92.07,6.35 270 bottom
U5  FT231  [QFN65P400X400X100-21N]  91.44,41.27 0 bottom
U6  MCP4728-E/UN  [SOP50P490X110-10N]  27.3,35.88 90 bottom
U7  LM75BGD  [SOT996-2/3]  23.49,19.05 180 bottom
U8  FXLH1T45  [MICROPAK-6]  94.93,48.89 0 top
U9  MCP4728-E/UN  [SOP50P490X110-10N]  74.3,21.27 270 bottom
U10  LM75BGD  [SOT996-2/3]  78.1,38.1 0 bottom
U11  AP22966  [V-DFN3020-14]  67.82,13.97 90 top
U12  AP22966  [V-DFN3020-14]  33.78,43.18 270 top
U13  MIC94040  [MLF-4]  10.79,52.07 270 top
U14  NTLUD4C26N  [UDFN6]  87.95,30.8 90 top
U15  LTC4365  [DFN8]  96.2,32.38 270 top
U16  MIC94040  [MLF-4]  10.79,5.08 90 top
U17  PMEG2020CPAS  [DFN2020D-3]  91.12,28.57 180 top
U18  PMEG2020CPAS  [DFN2020D-3]  25.08,28.57 180 bottom
U19  MIC94040  [MLF-4]  98.42,48.26 180 bottom
U20  LT1965  [DFN3X3_8LEAD]  78.74,28.57 180 bottom
U21  PMEG2020CPAS  [DFN2020D-3]  98.42,45.72 180 bottom
U22  NTLUD4C26N  [UDFN6]  87.95,26.35 90 top
U23  PAC1720  [DFN3X3_10LEAD]  90.81,20.32 0 bottom
U25  LTC4365  [DFN8]  96.2,24.77 90 top
U27  MCP23009  [QFN50P300X300X80-17N]  19.05,35.88 45 top
U28  MCP23009  [QFN50P300X300X80-17N]  82.55,21.27 225 top
U29  AP7312-3333W6-7  [DFN2018-6]  80.01,43.81 0 top
U30  AP7312-3333W6-7  [DFN2018-6]  21.59,13.33 180 top
U31  AP7312-3333W6-7  [DFN2018-6]  82.55,43.81 0 top
U32  AP7312-3333W6-7  [DFN2018-6]  19.05,13.33 180 top
U33  AP7312-3333W6-7  [DFN2018-6]  19.05,19.05 180 top
U34  AP7312-3333W6-7  [DFN2018-6]  82.55,38.1 0 top
U35  ADS1018  [X2QFN-10]  5.84,46.99 90 top
U36  ADS1018  [X2QFN-10]  5.08,20.45 180 top
U37  MCP46X2  [DFN-10]  11.11,46.99 90 top
U38  MCP46X2  [DFN-10]  5.08,25.72 180 top
U39  ADS1018  [X2QFN-10]  5.08,30.61 180 top
U40  ADS1018  [X2QFN-10]  11.94,10.16 270 top
U41  MCP46X2  [DFN-10]  5.08,35.88 180 top
U42  MCP46X2  [DFN-10]  6.67,10.16 270 top
U43  ADS1018  [X2QFN-10]  68.07,41.27 90 top
U44  ADS1018  [X2QFN-10]  45.21,40 90 top
U45  MCP46X2  [DFN-10]  73.34,41.27 90 top
U46  MCP46X2  [DFN-10]  50.48,40 90 top
U47  ADS1018  [X2QFN-10]  56.64,41.27 90 top
U48  ADS1018  [X2QFN-10]  33.78,38.1 90 top
U49  MCP46X2  [DFN-10]  61.91,41.27 90 top
U50  MCP46X2  [DFN-10]  39.05,38.1 90 top
U51  ADS1018  [X2QFN-10]  33.53,15.88 270 top
U52  ADS1018  [X2QFN-10]  56.39,17.14 270 top
U53  MCP46X2  [DFN-10]  28.26,15.88 270 top
U54  MCP46X2  [DFN-10]  51.12,17.14 270 top
U55  ADS1018  [X2QFN-10]  44.96,15.88 270 top
U56  ADS1018  [X2QFN-10]  67.82,19.05 270 top
U57  MCP46X2  [DFN-10]  39.69,15.88 270 top
U58  MCP46X2  [DFN-10]  62.55,19.05 270 top
U59  24AA00OT  [SOT23-5L]  98.42,20.32 0 bottom
U_I  TPS82085  [MICROSIP]  73.72,38.1 270 bottom
U_J  TPS82085DD  [MICROSIP-DD]  68.64,38.1 270 bottom
U_K  TPS82085  [MICROSIP]  62.29,38.1 270 bottom
U_L  TPS82085DD  [MICROSIP-DD]  57.21,38.1 270 bottom
U_M  TPS82085  [MICROSIP]  50.86,36.83 270 bottom
U_N  TPS82085DD  [MICROSIP-DD]  45.78,36.83 270 bottom
U_O  TPS82085  [MICROSIP]  39.43,34.92 270 bottom
U_P  TPS82085DD  [MICROSIP-DD]  34.35,34.92 270 bottom
U_Q  TPS82085  [MICROSIP]  27.88,19.05 90 bottom
U_R  TPS82085DD  [MICROSIP-DD]  32.96,19.05 90 bottom
U_S  TPS82085  [MICROSIP]  39.31,19.05 90 bottom
U_T  TPS82085DD  [MICROSIP-DD]  44.39,19.05 90 bottom
U_U  TPS82085  [MICROSIP]  50.74,20.32 90 bottom
U_V  TPS82085DD  [MICROSIP-DD]  55.82,20.32 90 bottom
U_W  TPS82085  [MICROSIP]  62.17,22.23 90 bottom
U_X  TPS82085DD  [MICROSIP-DD]  67.25,22.23 90 bottom
UA  TPS82085  [MICROSIP]  11.49,43.81 270 bottom
UB  TPS82085DD  [MICROSIP-DD]  6.41,43.81 270 bottom
UC  TPS82085  [MICROSIP]  8.25,36.26 180 bottom
UD  TPS82085DD  [MICROSIP-DD]  8.25,31.18 180 bottom
UE  TPS82085  [MICROSIP]  8.25,26.1 180 bottom
UF  TPS82085DD  [MICROSIP-DD]  8.25,21.02 180 bottom
UG  TPS82085  [MICROSIP]  6.29,13.33 90 bottom
UH  TPS82085DD  [MICROSIP-DD]  11.37,13.33 90 bottom
USB  5_USB_3S  [MICRO-AB-H-SMT]  101.6,41.27 90 top
X1  PICO-SPOX-5  [PICO-SPOX-5]  97.79,28.57 90 bottom
ZED  µZ-FCI-CONONLY  [µZ-CONONLY]  50.8,28.57 180 bottom

## Library data of the parts
BETA ZED = microzed
C1-C131 D1 D2 FB1-FB26 R1-R19 R22-R69 = generic-rcl
CNW CSE = spx3819; MPN: SPX3819M5-L; OC_FARNELL: 1831948; OC_NEWARK: 23R9689; PACKAGE: SOT-23-5; SUPPLIER: EXAR
D3 D4 = pmeg2010beld
F1-F8 = fiducial
IO_C IO_E IO_W = microchip-exp
IOC PC_C PC_E PC_W = pic16f15386
JP1 = pinhead-2
LED = led
LOGO2 = ohw-logo
PB-NW PB-SE = df12
PWR-NE PWR-NW PWR-SE PWR-SW = pincon
RN1-RN13 = resistor-dil; OC_FARNELL: unknown; OC_NEWARK: unknown
S1 = switch
SD1 = micro-sd
U1 U8 = lvltrans
U2 U3 = gtl2002
U4 = emifil; MPN: IP4251CZ16-8-TTL; OC_FARNELL: 1972684; OC_NEWARK: 58T9585; PACKAGE: SON-16; SUPPLIER: NXP
U5 = ft23x
U6 U9 = mcp4728; MPN: MCP4728-E/UN; OC_FARNELL: 1800217; OC_NEWARK: 08R1808; PACKAGE: MSOP-10; SUPPLIER: MICROCHIP
U7 U10 = lm75
U11 U12 = AP22966
U13 U16 U19 = load_switch
U14 U22 = ntlud4c26n
U15 U25 = ltc4365
U17 U18 U21 = pmeg2020cpas
U20 = lt1965
U23 = pac1720
U27 U28 = mcp23009
U29-U34 = ldo
U35 U36 U39 U40 U43 U44 U47 U48 U51 U52 U55 U56 = ADS1x18
U37 U38 U41 U42 U45 U46 U49 U50 U53 U54 U57 U58 = digipot
U59 = microchip; MF: MICROCHIP; MPN: 24AA00T-I/OTG; OC_FARNELL: 1331264; OC_NEWARK: 89H3038
U_I U_J U_K U_L U_M U_N U_O U_P U_Q U_R U_S U_T U_U U_V U_W U_X UA UB UC UD UE UF UG UH = TPS82085
USB = usb; TE: 1981584
X1 = pico-spox

## Nets
!ALERT: PC_E.46 U23.7
!CS0: PC_W.36 U35.2
!CS1: PC_W.37 U39.2
!CS2: PC_W.39 U36.2
!CS3: PC_W.38 U40.2
!CS4: PC_C.36 U43.2
!CS5: PC_C.37 U47.2
!CS6: PC_C.38 U44.2
!CS7: PC_C.39 U48.2
!CS8: PC_C.12 U51.2
!CS9: PC_C.13 U55.2
!CS10: PC_C.14 U52.2
!CS11: PC_C.15 U56.2
!RESET: IOC.28 U5.11
A_!RST: PB-NW.1 PC_W.25
A_SCL: PB-NW.2 RN1.1 U2.3
A_SDA: PB-NW.4 RN1.2 U2.4
ANY_IN: C34.1 U17.3 U17.4 U20.7 U20.8
B_!RST: PB-SE.1 PC_E.13
B_SCL: PB-SE.2 RN2.1 U3.3
B_SDA: PB-SE.4 RN2.2 U3.4
BANK13_00_N [LVDS]: BETA.89 ZED.89
BANK13_00_P [LVDS]: BETA.87 ZED.87
BANK13_01_N [LVDS]: BETA.90 ZED.90
BANK13_01_P [LVDS]: BETA.88 ZED.88
BANK13_02_N [LVDS]: BETA.93 ZED.93
BANK13_02_P [LVDS]: BETA.91 ZED.91
BANK13_03_N [LVDS]: BETA.94 ZED.94
BANK13_03_P [LVDS]: BETA.92 ZED.92
BANK13_04_N [LVDS]: BETA.195 ZED.195
BANK13_04_P [LVDS]: BETA.193 ZED.193
BANK13_05_N: BETA.196 ZED.196
BANK13_05_P: BETA.194 ZED.194
BANK13_06_N [LVDS]: BETA.199 ZED.199
BANK13_06_P [LVDS]: BETA.197 ZED.197
BANK13_SE_0: BETA.200 ZED.200
BETA_5V: C7.1 C8.1 C13.1 C14.1 C31.1 C32.1 C33.1 C60.1 C61.1 C62.1 C64.1 C66.1 C67.1 C68.1 C70.1 C72.1 C73.1 C74.1 C76.1 C78.1 C79.1 C80.1 C82.1 C84.1 C85.1 C86.1 C88.1 C90.1 C91.1 C92.1 C94.1 C96.1 C97.1 C98.1 C100.1 C102.1 C103.1 C104.1 C106.1 C108.1 C109.1 C110.1 C112.1 C114.1 C115.1 C116.1 C118.1 C120.1 C121.1 C122.1 C124.1 C126.1 C127.1 C128.1 C130.1 IO_C.8 IO_E.8 IO_W.8 RN3.3 RN3.4 RN4.3 RN4.4 RN5.3 RN5.4 RN6.3 RN6.4 RN8.3 RN8.4 RN9.3 RN9.4 RN10.3 RN10.4 RN11.3 RN11.4 RN12.3 RN12.4 U6.1 U7.5 U7.6 U7.7 U7.8 U9.1 U10.5 U10.6 U10.7 U10.8 U11.1 U11.3 U11.5 U12.1 U12.3 U12.5 U14.6 U14.D1 U15.6 U18.1 U18.2 U23.10 U27.3 U28.3 U35.8 U36.8 U37.10 U38.9 U38.10 U39.8 U40.8 U41.1 U41.10 U42.1 U42.9 U42.10 U43.8 U44.8 U45.10 U46.9 U46.10 U47.8 U48.8 U49.1 U49.10 U50.1 U50.9 U50.10 U51.8 U52.8 U53.10 U54.9 U54.10 U55.8 U56.8 U57.1 U57.10 U58.1 U58.9 U58.10 U59.4 U_I.3 U_I.4 U_J.3 U_J.4 U_K.3 U_K.4 U_L.3 U_L.4 U_M.3 U_M.4 U_N.3 U_N.4 U_O.3 U_O.4 U_P.3 U_P.4 U_Q.3 U_Q.4 U_R.3 U_R.4 U_S.3 U_S.4 U_T.3 U_T.4 U_U.3 U_U.4 U_V.3 U_V.4 U_W.3 U_W.4 U_X.3 U_X.4 UA.3 UA.4 UB.3 UB.4 UC.3 UC.4 UD.3 UD.4 UE.3 UE.4 UF.3 UF.4 UG.3 UG.4 UH.3 UH.4
BETA_!FAULT: PC_E.24 U15.7
BETA_!SHDN: PC_E.23 U15.8
BETA_GATE: U14.2 U14.5 U15.5
BETA_IN: R10.2 R11.1 U14.3 U14.D2 U15.4 U17.2 U23.2
BETA_OV: R12.2 R13.1 U15.2
BETA_SUP: R10.1 U23.1 X1.4 X1.4A
BETA_UV: R11.2 R12.1 U15.3
BTN: PC_W.26 S1.2
C_RA0: PC_C.21
C_RA1: PC_C.22
C_RA4: PC_C.25
C_RA5: PC_C.26
C_RA6: PC_C.33
C_RA7: PC_C.32
C_RB0: PC_C.8
C_RC0: PC_C.34
C_RC1: PC_C.35
C_RC7: PC_C.1
C_RD7: PC_C.5
C_RE0: PC_C.27
C_RE1: PC_C.28
C_RE2: PC_C.29
CBUS2: IOC.36 U5.7
CC_!MCLR: IOC.20 U5.16
CC_JX1: IOC.8 U8.3
CC_PCLK: IOC.18 U5.15
CC_PDAT: IOC.19 U5.14
CC_RC2: IOC.40
CC_RC3: IOC.41
CC_SE_0: IOC.47 U1.6
CC_SE_1: IOC.48 U1.7
CD: SD1.CD1 SD1.CD2 U4.1
CD': IOC.32 U4.16
CLK: SD1.5 U4.5
CMD: R3.2 SD1.3 U4.4
CNW_EN: CNW.3 PC_W.22
CNW_PG: C55.1 CNW.4
CSE_EN: CSE.3 PC_E.15
CSE_PG: C58.1 CSE.4
CSO_NE_V: BETA.7 FB9.2
CSO_NW_V: FB14.2 PWR-NW.6
CSO_SE_V: FB22.2 PWR-SE.6
CSO_SW_V: BETA.112 FB4.2
D0: IOC.5 U5.17
D1: IOC.45 U5.1
D2: IOC.3 U5.19
D3: IOC.2 U5.6
D4: IOC.4 U5.18
D5: IOC.43 U5.4
D6: IOC.42 U5.5
D7: IOC.44 U5.2
DAT0: R4.2 SD1.7 U4.6
DAT1: R5.2 SD1.8 U4.7
DAT2: R6.2 SD1.1 U4.2
DAT3: SD1.2 U4.3
DM: R7.2 U5.9
DP: R8.2 U5.8
DXP_0_N: BETA.100 ZED.100
DXP_0_P: BETA.98 ZED.98
E_B_SCL: PC_E.47 RN2.4 U3.6
E_B_SDA: PC_E.48 RN2.3 U3.5
E_I2C_EN: PC_E.36 U29.2
E_I2C_V: C38.1 PWR-NE.6 U29.6
E_RA4: PC_E.25
E_RC2: PC_E.40 R19.1
E_RD2: PC_E.44
E_RD3: PC_E.45
E_RD4: PC_E.2
E_RE0: PC_E.27
E_RE1: PC_E.28
E_RF1: PC_E.37
E_RF2: PC_E.38
E_RF3: PC_E.39
E_SPI_EN: PC_E.34 U31.2
E_SPI_V: C44.1 PWR-NE.8 U31.6
E_VE: FB25.2 PC_E.1 PWR-SE.4
E_VE_CV: PB-SE.20 U9.6
E_VE_OV: PB-SE.9 U28.13
E_VE_UV: PB-SE.11 U28.12
EN_3: U12.2
EN_4: U12.4
EN_5: U11.2
EN_6: U11.4
EN_A: IO_W.16 UA.1
EN_B: IO_W.18 UB.1
EN_C: IO_W.20 UC.1
EN_D: IO_W.22 UD.1
EN_E: IO_W.1 UE.1
EN_F: IO_W.3 UF.1
EN_G: IO_W.5 UG.1
EN_H: IO_W.7 UH.1
EN_I: IO_E.1 U_I.1
EN_J: IO_E.3 U_J.1
EN_K: IO_E.5 U_K.1
EN_L: IO_E.7 U_L.1
EN_M: IO_C.16 U_M.1
EN_N: IO_C.18 U_N.1
EN_O: IO_C.20 U_O.1
EN_P: IO_C.22 U_P.1
EN_Q: IO_C.1 U_Q.1
EN_R: IO_C.3 U_R.1
EN_S: IO_C.5 U_S.1
EN_T: IO_C.7 U_T.1
EN_U: IO_E.16 U_U.1
EN_V: IO_E.18 U_V.1
EN_W: IO_E.20 U_W.1
EN_X: IO_E.22 U_X.1
EXTA: IOC.10 JP1.2
EXTB: IOC.9 JP1.4
FAN_SUP: JP1.1 U19.1
FAN_SUP_EN: IOC.1 U19.4
FB_A: R24.2 U37.6 UA.7
FB_B: R28.2 U37.7 UB.7
FB_C: R32.2 U41.6 UC.7
FB_D: R36.2 U41.7 UD.7
FB_E: R25.2 U38.6 UE.7
FB_F: R29.2 U38.7 UF.7
FB_G: R33.2 U42.6 UG.7
FB_H: R37.2 U42.7 UH.7
FB_I: R40.2 U45.6 U_I.7
FB_J: R44.2 U45.7 U_J.7
FB_K: R48.2 U49.6 U_K.7
FB_L: R52.2 U49.7 U_L.7
FB_M: R41.2 U46.6 U_M.7
FB_N: R45.2 U46.7 U_N.7
FB_O: R49.2 U50.6 U_O.7
FB_P: R53.2 U50.7 U_P.7
FB_Q: R56.2 U53.6 U_Q.7
FB_R: R60.2 U53.7 U_R.7
FB_S: R64.2 U57.6 U_S.7
FB_T: R68.2 U57.7 U_T.7
FB_U: R57.2 U54.6 U_U.7
FB_V: R61.2 U54.7 U_V.7
FB_W: R65.2 U58.6 U_W.7
FB_X: R69.2 U58.7 U_X.7
GND: BETA.15 BETA.16 BETA.21 BETA.22 BETA.27 BETA.28 BETA.33 BETA.34 BETA.39 BETA.40 BETA.45 BETA.46 BETA.51 BETA.52 BETA.65 BETA.66 BETA.71 BETA.72 BETA.77 BETA.85 BETA.86 BETA.95 BETA.96 BETA.115 BETA.116 BETA.121 BETA.122 BETA.127 BETA.128 BETA.133 BETA.134 BETA.139 BETA.140 BETA.145 BETA.146 BETA.151 BETA.152 BETA.165 BETA.166 BETA.171 BETA.172 BETA.177 BETA.185 BETA.186 BETA.191 BETA.192 C1.2 C2.2 C3.2 C4.2 C5.2 C6.2 C7.2 C8.2 C9.2 C10.2 C11.2 C12.2 C13.2 C14.2 C15.2 C16.2 C17.2 C18.2 C19.2 C20.2 C21.2 C22.2 C23.2 C24.2 C25.2 C26.2 C27.2 C28.2 C29.2 C30.2 C31.2 C32.2 C33.2 C34.2 C35.2 C36.2 C37.2 C38.2 C39.2 C40.2 C41.2 C42.2 C43.2 C44.2 C45.2 C46.2 C47.2 C48.2 C49.2 C50.2 C51.2 C52.2 C53.2 C54.2 C55.2 C56.2 C57.2 C58.2 C59.2 C60.2 C61.2 C62.2 C63.2 C64.2 C65.2 C66.2 C67.2 C68.2 C69.2 C70.2 C71.2 C72.2 C73.2 C74.2 C75.2 C76.2 C77.2 C78.2 C79.2 C80.2 C81.2 C82.2 C83.2 C84.2 C85.2 C86.2 C87.2 C88.2 C89.2 C90.2 C91.2 C92.2 C93.2 C94.2 C95.2 C96.2 C97.2 C98.2 C99.2 C100.2 C101.2 C102.2 C103.2 C104.2 C105.2 C106.2 C107.2 C108.2 C109.2 C110.2 C111.2 C112.2 C113.2 C114.2 C115.2 C116.2 C117.2 C118.2 C119.2 C120.2 C121.2 C122.2 C123.2 C124.2 C125.2 C126.2 C127.2 C128.2 C129.2 C130.2 C131.2 CNW.2 CSE.2 D1.2 D2.2 IO_C.11 IO_C.23 IO_C.25 IO_E.11 IO_E.23 IO_E.25 IO_W.11 IO_W.23 IO_W.25 IOC.6 IOC.31 IOC.EP JP1.3 PB-NW.6 PB-SE.6 PC_C.6 PC_C.31 PC_C.EP PC_E.6 PC_E.31 PC_E.EP PC_W.6 PC_W.31 PC_W.EP PWR-NE.2 PWR-NE.4 PWR-NW.1 PWR-NW.3 PWR-SE.1 PWR-SE.3 PWR-SW.2 PWR-SW.4 R13.2 R17.2 R24.1 R25.1 R28.1 R29.1 R32.1 R33.1 R36.1 R37.1 R40.1 R41.1 R44.1 R45.1 R48.1 R49.1 R52.1 R53.1 R56.1 R57.1 R60.1 R61.1 R64.1 R65.1 R68.1 R69.1 S1.1 SD1.6 SD1.MT1 SD1.MT2 U1.4 U2.1 U3.1 U4.17 U5.3 U5.13 U5.EP U6.10 U7.4 U8.2 U9.10 U10.4 U11.8 U11.EP U12.8 U12.EP U13.2 U15.1 U15.EP U16.2 U19.2 U20.4 U20.5 U20.9 U23.5 U23.6 U23.EPAD U25.1 U25.EP U27.1 U27.6 U27.EP U28.1 U28.6 U28.EP U29.4 U29.10 U30.4 U30.10 U31.4 U31.10 U32.4 U32.10 U33.4 U33.10 U34.4 U34.10 U35.3 U36.3 U37.1 U37.4 U37.9 U37.EP U38.1 U38.4 U38.EP U39.3 U40.3 U41.4 U41.9 U41.EP U42.4 U42.EP U43.3 U44.3 U45.1 U45.4 U45.9 U45.EP U46.1 U46.4 U46.EP U47.3 U48.3 U49.4 U49.9 U49.EP U50.4 U50.EP U51.3 U52.3 U53.1 U53.4 U53.9 U53.EP U54.1 U54.4 U54.EP U55.3 U56.3 U57.4 U57.9 U57.EP U58.4 U58.EP U59.2 U_I.5 U_I.6 U_I.EP U_J.5 U_J.6 U_J.EP U_K.5 U_K.6 U_K.EP U_L.5 U_L.6 U_L.EP U_M.5 U_M.6 U_M.EP U_N.5 U_N.6 U_N.EP U_O.5 U_O.6 U_O.EP U_P.5 U_P.6 U_P.EP U_Q.5 U_Q.6 U_Q.EP U_R.5 U_R.6 U_R.EP U_S.5 U_S.6 U_S.EP U_T.5 U_T.6 U_T.EP U_U.5 U_U.6 U_U.EP U_V.5 U_V.6 U_V.EP U_W.5 U_W.6 U_W.EP U_X.5 U_X.6 U_X.EP UA.5 UA.6 UA.EP UB.5 UB.6 UB.EP UC.5 UC.6 UC.EP UD.5 UD.6 UD.EP UE.5 UE.6 UE.EP UF.5 UF.6 UF.EP UG.5 UG.6 UG.EP UH.5 UH.6 UH.EP USB.5 X1.1 X1.1A X1.5 X1.5A ZED.15 ZED.16 ZED.21 ZED.22 ZED.27 ZED.28 ZED.33 ZED.34 ZED.39 ZED.40 ZED.45 ZED.46 ZED.51 ZED.52 ZED.65 ZED.66 ZED.71 ZED.72 ZED.77 ZED.85 ZED.86 ZED.95 ZED.96 ZED.115 ZED.116 ZED.121 ZED.122 ZED.127 ZED.128 ZED.133 ZED.134 ZED.139 ZED.140 ZED.145 ZED.146 ZED.151 ZED.152 ZED.165 ZED.166 ZED.171 ZED.172 ZED.177 ZED.185 ZED.186 ZED.191 ZED.192
IOC_!RST: IO_C.12 PC_C.46
IOC_INT: IO_C.13 PC_C.40
IOC_SCL: IO_C.9 PC_C.45 RN9.2
IOC_SDA: IO_C.10 PC_C.44 RN9.1
IOE_!RST: IO_E.12 PC_C.23
IOE_INT: IO_E.13 PC_C.24
IOE_SCL: IO_E.9 RN12.2
IOE_SDA: IO_E.10 RN12.1
IOE_V: FB20.2 PWR-SE.5 RN2.7 RN2.8 U3.2
IONW_SCL: PC_W.43 RN10.2 U27.4
IONW_SDA: PC_W.42 RN10.1 U27.5
IOSE_SCL: PC_E.17 RN11.1 U28.4
IOSE_SDA: PC_E.16 RN11.2 U28.5
IOW_!RST: IO_W.12 PC_W.41
IOW_INT: IO_W.13 PC_W.40
IOW_SCL: IO_W.9 PC_W.45 RN8.2
IOW_SDA: IO_W.10 PC_W.44 RN8.1
IOW_V: FB12.2 PWR-NW.5 RN1.7 RN1.8 U2.2
JTAG_EN: PC_W.10 U32.2
JTAG_V: C47.1 PWR-SW.8 U32.6
JX1_00_N [LVDS]: BETA.13 ZED.13
JX1_00_P [LVDS]: BETA.11 ZED.11
JX1_01_N [LVDS]: BETA.14 ZED.14
JX1_01_P [LVDS]: BETA.12 ZED.12
JX1_02_N [LVDS]: BETA.19 ZED.19
JX1_02_P [LVDS]: BETA.17 ZED.17
JX1_03_N [LVDS]: BETA.20 ZED.20
JX1_03_P [LVDS]: BETA.18 ZED.18
JX1_04_N [LVDS]: BETA.25 ZED.25
JX1_04_P [LVDS]: BETA.23 ZED.23
JX1_05_N: BETA.26 ZED.26
JX1_05_P: BETA.24 ZED.24
JX1_06_N [LVDS]: BETA.31 ZED.31
JX1_06_P [LVDS]: BETA.29 ZED.29
JX1_07_N [LVDS]: BETA.32 ZED.32
JX1_07_P [LVDS]: BETA.30 ZED.30
JX1_08_N: BETA.37 ZED.37
JX1_08_P: BETA.35 ZED.35
JX1_09_N [LVDS]: BETA.38 ZED.38
JX1_09_P [LVDS]: BETA.36 ZED.36
JX1_10_N [LVDS]: BETA.43 ZED.43
JX1_10_P [LVDS]: BETA.41 ZED.41
JX1_11_N [LVDS]: BETA.44 ZED.44
JX1_11_P [LVDS]: BETA.42 ZED.42
JX1_12_N [LVDS]: BETA.49 ZED.49
JX1_12_P [LVDS]: BETA.47 ZED.47
JX1_13_N [LVDS]: BETA.50 ZED.50
JX1_13_P [LVDS]: BETA.48 ZED.48
JX1_14_N [LVDS]: BETA.55 ZED.55
JX1_14_P [LVDS]: BETA.53 ZED.53
JX1_15_N: BETA.56 ZED.56
JX1_15_P: BETA.54 ZED.54
JX1_16_N [LVDS]: BETA.63 ZED.63
JX1_16_P [LVDS]: BETA.61 ZED.61
JX1_17_N [LVDS]: BETA.64 ZED.64
JX1_17_P [LVDS]: BETA.62 ZED.62
JX1_18_N [LVDS]: BETA.69 ZED.69
JX1_18_P [LVDS]: BETA.67 ZED.67
JX1_19_N [LVDS]: BETA.70 ZED.70
JX1_19_P [LVDS]: BETA.68 ZED.68
JX1_20_N: BETA.75 ZED.75
JX1_20_P: BETA.73 ZED.73
JX1_21_N: BETA.76 ZED.76
JX1_21_P: BETA.74 ZED.74
JX1_22_N: BETA.83 ZED.83
JX1_22_P: BETA.81 ZED.81
JX1_23_N [LVDS]: BETA.84 ZED.84
JX1_23_P [LVDS]: BETA.82 ZED.82
JX1_DIR: IOC.38 U8.5
JX1_SE_0: BETA.9 ZED.9
JX1_SE_1: BETA.10 U8.4 ZED.10
JX2_00_N [LVDS]: BETA.119 ZED.119
JX2_00_P [LVDS]: BETA.117 ZED.117
JX2_01_N [LVDS]: BETA.120 ZED.120
JX2_01_P [LVDS]: BETA.118 ZED.118
JX2_02_N [LVDS]: BETA.125 ZED.125
JX2_02_P [LVDS]: BETA.123 ZED.123
JX2_03_N [LVDS]: BETA.126 ZED.126
JX2_03_P [LVDS]: BETA.124 ZED.124
JX2_04_N [LVDS]: BETA.131 ZED.131
JX2_04_P [LVDS]: BETA.129 ZED.129
JX2_05_N [LVDS]: BETA.132 ZED.132
JX2_05_P [LVDS]: BETA.130 ZED.130
JX2_06_N [LVDS]: BETA.137 ZED.137
JX2_06_P [LVDS]: BETA.135 ZED.135
JX2_07_N [LVDS]: BETA.138 ZED.138
JX2_07_P [LVDS]: BETA.136 ZED.136
JX2_08_N [LVDS]: BETA.143 ZED.143
JX2_08_P [LVDS]: BETA.141 ZED.141
JX2_09_N [LVDS]: BETA.144 ZED.144
JX2_09_P [LVDS]: BETA.142 ZED.142
JX2_10_N [LVDS]: BETA.149 ZED.149
JX2_10_P [LVDS]: BETA.147 ZED.147
JX2_11_N [LVDS]: BETA.150 ZED.150
JX2_11_P [LVDS]: BETA.148 ZED.148
JX2_12_N [LVDS]: BETA.155 ZED.155
JX2_12_P [LVDS]: BETA.153 ZED.153
JX2_13_N [LVDS]: BETA.156 ZED.156
JX2_13_P [LVDS]: BETA.154 ZED.154
JX2_14_N: BETA.163 ZED.163
JX2_14_P: BETA.161 ZED.161
JX2_15_N [LVDS]: BETA.164 ZED.164
JX2_15_P [LVDS]: BETA.162 ZED.162
JX2_16_N [LVDS]: BETA.169 ZED.169
JX2_16_P [LVDS]: BETA.167 ZED.167
JX2_17_N [LVDS]: BETA.170 ZED.170
JX2_17_P [LVDS]: BETA.168 ZED.168
JX2_18_N [LVDS]: BETA.175 ZED.175
JX2_18_P [LVDS]: BETA.173 ZED.173
JX2_19_N [LVDS]: BETA.176 ZED.176
JX2_19_P [LVDS]: BETA.174 ZED.174
JX2_20_N [LVDS]: BETA.183 ZED.183
JX2_20_P [LVDS]: BETA.181 ZED.181
JX2_21_N [LVDS]: BETA.184 ZED.184
JX2_21_P [LVDS]: BETA.182 ZED.182
JX2_22_N: BETA.189 ZED.189
JX2_22_P: BETA.187 ZED.187
JX2_23_N [LVDS]: BETA.190 ZED.190
JX2_23_P [LVDS]: BETA.188 ZED.188
JX2_SE_0: U1.3 ZED.113
JX2_SE_1: U1.2 ZED.114
LED_B: IOC.25 RN7.2
LED_G: IOC.11 R9.2
LED_R: IOC.26 RN7.1
MEAS_A: FB3.1 R22.2 U35.4 U37.5
MEAS_B: FB5.1 R26.2 U35.6 U37.8
MEAS_C: FB7.1 R30.2 U39.4 U41.5
MEAS_D: FB9.1 R34.2 U39.6 U41.8
MEAS_E: FB4.1 R23.2 U36.4 U38.5
MEAS_F: FB6.1 R27.2 U36.6 U38.8
MEAS_G: FB8.1 R31.2 U40.4 U42.5
MEAS_H: FB10.1 R35.2 U40.6 U42.8
MEAS_I: FB11.1 R38.2 U43.4 U45.5
MEAS_J: FB13.1 R42.2 U43.6 U45.8
MEAS_K: FB15.1 R46.2 U47.4 U49.5
MEAS_L: FB17.1 R50.2 U47.6 U49.8
MEAS_M: FB12.1 R39.2 U44.4 U46.5
MEAS_N: FB14.1 R43.2 U44.6 U46.8
MEAS_O: FB16.1 R47.2 U48.4 U50.5
MEAS_P: FB18.1 R51.2 U48.6 U50.8
MEAS_Q: FB19.1 R54.2 U51.4 U53.5
MEAS_R: FB21.1 R58.2 U51.6 U53.8
MEAS_S: FB23.1 R62.2 U55.4 U57.5
MEAS_T: FB25.1 R66.2 U55.6 U57.8
MEAS_U: FB20.1 R55.2 U52.4 U54.5
MEAS_V: FB22.1 R59.2 U52.6 U54.8
MEAS_W: FB24.1 R63.2 U56.4 U58.5
MEAS_X: FB26.1 R67.2 U56.6 U58.8
MIX_SUP: U19.3 U21.3 U21.4
N$3: C3.1 C4.1 FB1.2 R3.1 R4.1 R5.1 R6.1 SD1.4
N$4: LED.5 RN7.3
N$7: LED.4 RN7.4
N$8: LED.3 R9.1
N$12: C5.1 R7.1 USB.2
N$17: C6.1 R8.1 USB.3
N$18: U14.1 U14.4
N$23: C15.1 U12.7
N$24: C16.1 U12.9
N$25: C9.1 U11.7
N$26: C10.1 U11.9
N$28: D1.1 R18.2
N$29: D2.1 R19.2
N$32: C1.1 R1.2 U2.7 U2.8
N$33: C2.1 R2.2 U3.7 U3.8
N$38: U22.1 U22.4
N$44: IOC.37
N$46: IOC.39
N$57: IOC.27
N$64: U20.6
N$230: ZED.110
N$231: ZED.111
N_CHK_V: C56.1 CNW.5 PB-NW.13 PC_W.23
N_I2C_EN: PC_E.33 U31.3
N_I2C_V: C43.1 PWR-NE.7 U31.5
N_SPI_EN: PC_E.35 U29.3
N_SPI_V: C37.1 PWR-NE.5 U29.5
N_VE: FB11.2 PWR-NE.3
N_VE_CV: PB-NW.18 U6.7
N_VE_OV: PB-NW.7 U27.14
N_VE_RS: PB-NW.8 PC_W.27
N_VE_UV: PB-NW.19 U27.9
N_VN: FB13.2 PWR-NE.1
N_VN_CV: PB-NW.16 U6.8
N_VN_OV: PB-NW.5 U27.15
N_VN_RS: PB-NW.12 PC_W.29
N_VN_UV: PB-NW.17 U27.10
N_VW: FB15.2 PWR-NW.2
N_VW_CV: PB-NW.14 U6.9
N_VW_OV: PB-NW.3 U27.16
N_VW_RS: PB-NW.10 PC_W.28
N_VW_UV: PB-NW.15 U27.11
NC$1 [LVDS]: BETA.113
NC$2 [LVDS]: BETA.114
NW_!LDAC: PC_W.33 U6.4
NW_!RST: PC_W.35 U27.7
NW_INT: PC_W.34 U27.8
OS2: PC_E.26 U10.3
OS3: PC_W.13 U7.3
PCC_!MCLR: PC_C.20 PC_E.41
PCC_PCLK: PC_C.18 PC_E.43
PCC_PDAT: PC_C.19 PC_E.42
PCE_!MCLR: IOC.29 PC_E.20
PCE_PCLK: IOC.17 PC_E.18
PCE_PDAT: IOC.16 PC_E.19
PCIE_I2C_EN: PC_W.1 U33.3
PCIE_I2C_V: BETA.198 C49.1 U33.5
PCIE_N_5V: BETA.59 BETA.60 C18.1 U12.10
PCIE_N_V: BETA.79 BETA.80 FB7.2
PCIE_N_VCCIO: BETA.78 U13.1
PCIE_NIO_EN: PC_W.21 U13.4
PCIE_S_5V: BETA.159 BETA.160 C11.1 U11.6
PCIE_S_V: BETA.179 BETA.180 FB6.2
PCIE_S_VCCIO: BETA.178 U16.1
PCIE_SIO_EN: PC_W.14 U16.4
PCW_!MCLR: PC_C.41 PC_W.20
PCW_PCLK: PC_C.43 PC_W.18
PCW_PDAT: PC_C.42 PC_W.19
PEX_N_V: BETA.57 BETA.58 C17.1 U12.6
PEX_S_V: BETA.157 BETA.158 C12.1 U11.10
PG_A: IO_W.15 UA.2
PG_B: IO_W.17 UB.2
PG_C: IO_W.19 UC.2
PG_D: IO_W.21 UD.2
PG_E: IO_W.24 UE.2
PG_F: IO_W.2 UF.2
PG_G: IO_W.4 UG.2
PG_H: IO_W.6 UH.2
PG_I: IO_E.24 U_I.2
PG_J: IO_E.2 U_J.2
PG_K: IO_E.4 U_K.2
PG_L: IO_E.6 U_L.2
PG_M: IO_C.15 U_M.2
PG_N: IO_C.17 U_N.2
PG_O: IO_C.19 U_O.2
PG_P: IO_C.21 U_P.2
PG_Q: IO_C.24 U_Q.2
PG_R: IO_C.2 U_R.2
PG_S: IO_C.4 U_S.2
PG_T: IO_C.6 U_T.2
PG_U: IO_E.15 U_U.2
PG_V: IO_E.17 U_V.2
PG_W: IO_E.19 U_W.2
PG_X: IO_E.21 U_X.2
PMOD_D0: U4.10 ZED.101
PMOD_D1: U4.11 ZED.102
PMOD_D2: U4.13 ZED.103
PMOD_D3: U4.12 ZED.104
PMOD_D6: U4.15 ZED.107
PMOD_D7: U4.14 ZED.108
PMOD_SCL: IOC.34 RN13.2 ZED.105
PMOD_SDA: IOC.35 RN13.1 ZED.106
RFAB_E_V: FB26.2 PWR-SE.8
RFAB_W_V: FB18.2 PWR-NW.8
RFE_V: FB24.2 PWR-SE.7
RFW_V: FB16.2 PWR-NW.7
S_CHK_V: C59.1 CSE.5 PB-SE.13 PC_E.14
S_I2C_EN: PC_W.9 U32.3
S_I2C_V: C46.1 PWR-SW.7 U32.5
S_SPI_EN: PC_W.11 U30.3
S_SPI_V: C40.1 PWR-SW.5 U30.5
S_VE: FB23.2 PWR-SE.2
S_VE_CV: PB-SE.14 U9.9
S_VE_OV: PB-SE.3 U28.16
S_VE_RS: PB-SE.10 PC_E.4
S_VE_UV: PB-SE.15 U28.11
S_VS: FB21.2 PWR-SW.1
S_VS_CV: PB-SE.16 U9.8
S_VS_OV: PB-SE.5 U28.15
S_VS_RS: PB-SE.12 PC_E.5
S_VS_UV: PB-SE.17 U28.10
S_VW: FB19.2 PWR-SW.3
S_VW_CV: PB-SE.18 U9.7
S_VW_OV: PB-SE.7 U28.14
S_VW_RS: PB-SE.8 PC_E.3
S_VW_UV: PB-SE.19 U28.9
SCK1: PC_W.46 U35.1 U36.1 U39.1 U40.1
SCK2: PC_C.9 U43.1 U44.1 U47.1 U48.1
SCK3: PC_C.4 U51.1 U52.1 U55.1 U56.1
SCL1: PC_W.5 RN3.2 U6.2 U37.2 U38.2 U41.2 U42.2
SCL2: PC_C.16 RN6.1 U10.2 U45.2 U46.2 U49.2 U50.2
SCL3: PC_C.48 RN4.1 U7.2 U53.2 U54.2 U57.2 U58.2
SCL4: PC_E.8 RN5.2 U9.2 U23.9 U59.1
SD_V: C52.1 FB1.1 U34.5
SD_V_EN: PC_E.29 U34.3
SDA1: PC_W.4 RN3.1 U6.3 U37.3 U38.3 U41.3 U42.3
SDA2: PC_C.17 RN6.2 U10.1 U45.3 U46.3 U49.3 U50.3
SDA3: PC_C.47 RN4.2 U7.1 U53.3 U54.3 U57.3 U58.3
SDA4: PC_E.9 RN5.1 U9.3 U23.8 U59.3
SDI1: PC_W.48 U35.10 U36.10 U39.10 U40.10
SDI2: PC_C.10 U43.10 U44.10 U47.10 U48.10
SDI3: PC_C.3 U51.10 U52.10 U55.10 U56.10
SDO1: PC_W.47 U35.9 U36.9 U39.9 U40.9
SDO2: PC_C.11 U43.9 U44.9 U47.9 U48.9
SDO3: PC_C.2 U51.9 U52.9 U55.9 U56.9
SE_!LDAC: PC_E.10 U9.4
SE_!RST: PC_E.12 U28.7
SE_INT: PC_E.11 U28.8
SENSE: X1.3 X1.3A
UNUSED_EN: PC_W.8 U33.2
UNUSED_V: C50.1 U33.6
V33: C35.1 D3.A D4.A U20.1 U20.2 U20.3
VBAT: ZED.7
VBUS: FB2.2 USB.1
VCC: C53.1 D4.C IOC.7 IOC.30 LED.1 LED.2 LED.6 LED.7 RN13.3 RN13.4 U1.8 U5.20 U8.1 U21.1 U34.6
VCC_EN: PC_E.32 U34.2
VCCO_13 [LVDS]: FB10.2 ZED.198
VCCO_34: FB3.2 U8.6 U13.3 ZED.78 ZED.79 ZED.80
VCCO_35: FB8.2 U1.1 U1.5 U16.3 ZED.178 ZED.179 ZED.180
VLDO: C36.1 C39.1 C42.1 C45.1 C48.1 C51.1 C54.1 C57.1 CNW.1 CSE.1 FB5.2 U29.1 U30.1 U31.1 U32.1 U33.1 U34.1
VOUT3V3: U5.10
VOUT_A: C63.1 R22.1 U35.5 UA.8
VOUT_B: C69.1 R26.1 U35.7 UB.8
VOUT_C: C75.1 R30.1 U39.5 UC.8
VOUT_D: C81.1 R34.1 U39.7 UD.8
VOUT_E: C65.1 R23.1 U36.5 UE.8
VOUT_F: C71.1 R27.1 U36.7 UF.8
VOUT_G: C77.1 R31.1 U40.5 UG.8
VOUT_H: C83.1 R35.1 U40.7 UH.8
VOUT_I: C87.1 R38.1 U43.5 U_I.8
VOUT_J: C93.1 R42.1 U43.7 U_J.8
VOUT_K: C99.1 R46.1 U47.5 U_K.8
VOUT_L: C105.1 R50.1 U47.7 U_L.8
VOUT_M: C89.1 R39.1 U44.5 U_M.8
VOUT_N: C95.1 R43.1 U44.7 U_N.8
VOUT_O: C101.1 R47.1 U48.5 U_O.8
VOUT_P: C107.1 R51.1 U48.7 U_P.8
VOUT_Q: C111.1 R54.1 U51.5 U_Q.8
VOUT_R: C117.1 R58.1 U51.7 U_R.8
VOUT_S: C123.1 R62.1 U55.5 U_S.8
VOUT_T: C129.1 R66.1 U55.7 U_T.8
VOUT_U: C113.1 R55.1 U52.5 U_U.8
VOUT_V: C119.1 R59.1 U52.7 U_V.8
VOUT_W: C125.1 R63.1 U56.5 U_W.8
VOUT_X: C131.1 R67.1 U56.7 U_X.8
VP_0_N: BETA.99 ZED.99
VP_0_P: BETA.97 ZED.97
VPC: C19.1 C20.1 C21.1 C22.1 C23.1 C24.1 C25.1 C26.1 C27.1 C28.1 C29.1 C30.1 D3.C PC_C.7 PC_C.30 PC_E.7 PC_E.30 PC_W.7 PC_W.30 R1.1 R2.1 RN1.5 RN1.6 RN2.5 RN2.6 U18.3 U18.4
VUSB: FB2.1 U5.12
W_A_SCL: PC_W.2 RN1.4 U2.6
W_A_SDA: PC_W.3 RN1.3 U2.5
W_I2C_EN: PC_W.12 U30.2
W_I2C_V: C41.1 PWR-SW.6 U30.6
W_RA7: PC_W.32
W_RB4: PC_W.16
W_RB5: PC_W.17 R18.1
W_RF7: PC_W.15
W_VW: FB17.2 PC_W.24 PWR-NW.4
W_VW_CV: PB-NW.20 U6.6
W_VW_OV: PB-NW.9 U27.13
W_VW_UV: PB-NW.11 U27.12
ZED_5V: U21.2 U22.6 U22.D1 U25.6 ZED.57 ZED.58 ZED.59 ZED.60 ZED.112 ZED.157 ZED.158 ZED.159 ZED.160
ZED_!FAULT: PC_E.22 U25.7
ZED_!INIT: ZED.109
ZED_!SHDN: PC_E.21 U25.8
ZED_!SRST: IOC.23 ZED.6
ZED_DONE: IOC.24 ZED.8
ZED_GATE: U22.2 U22.5 U25.5
ZED_IN: R14.2 R15.1 U17.1 U22.3 U22.D2 U23.4 U25.4
ZED_OV: R16.2 R17.1 U25.2
ZED_PWR_EN: IOC.33 ZED.5
ZED_SUP: R14.1 U23.3 X1.2 X1.2A
ZED_TCK: IOC.13 ZED.1
ZED_TDI: IOC.15 ZED.4
ZED_TDO: IOC.12 ZED.3
ZED_TMS: IOC.14 ZED.2
ZED_UV: R15.2 R16.1 U25.3